# Altium PCB ESP-PCM1822Q1-breakout.PcbDoc
Units mil, origin at the board's own origin, x right, y up, seen from the top; angles counter-clockwise.
Board outline 7750 x 7750 mil, 4 copper layers (Top Layer, Layer 1, Layer 2, Bottom Layer), stack 23.756 mil thick; 84 components, 75 nets, 356 pads, 161 vias.
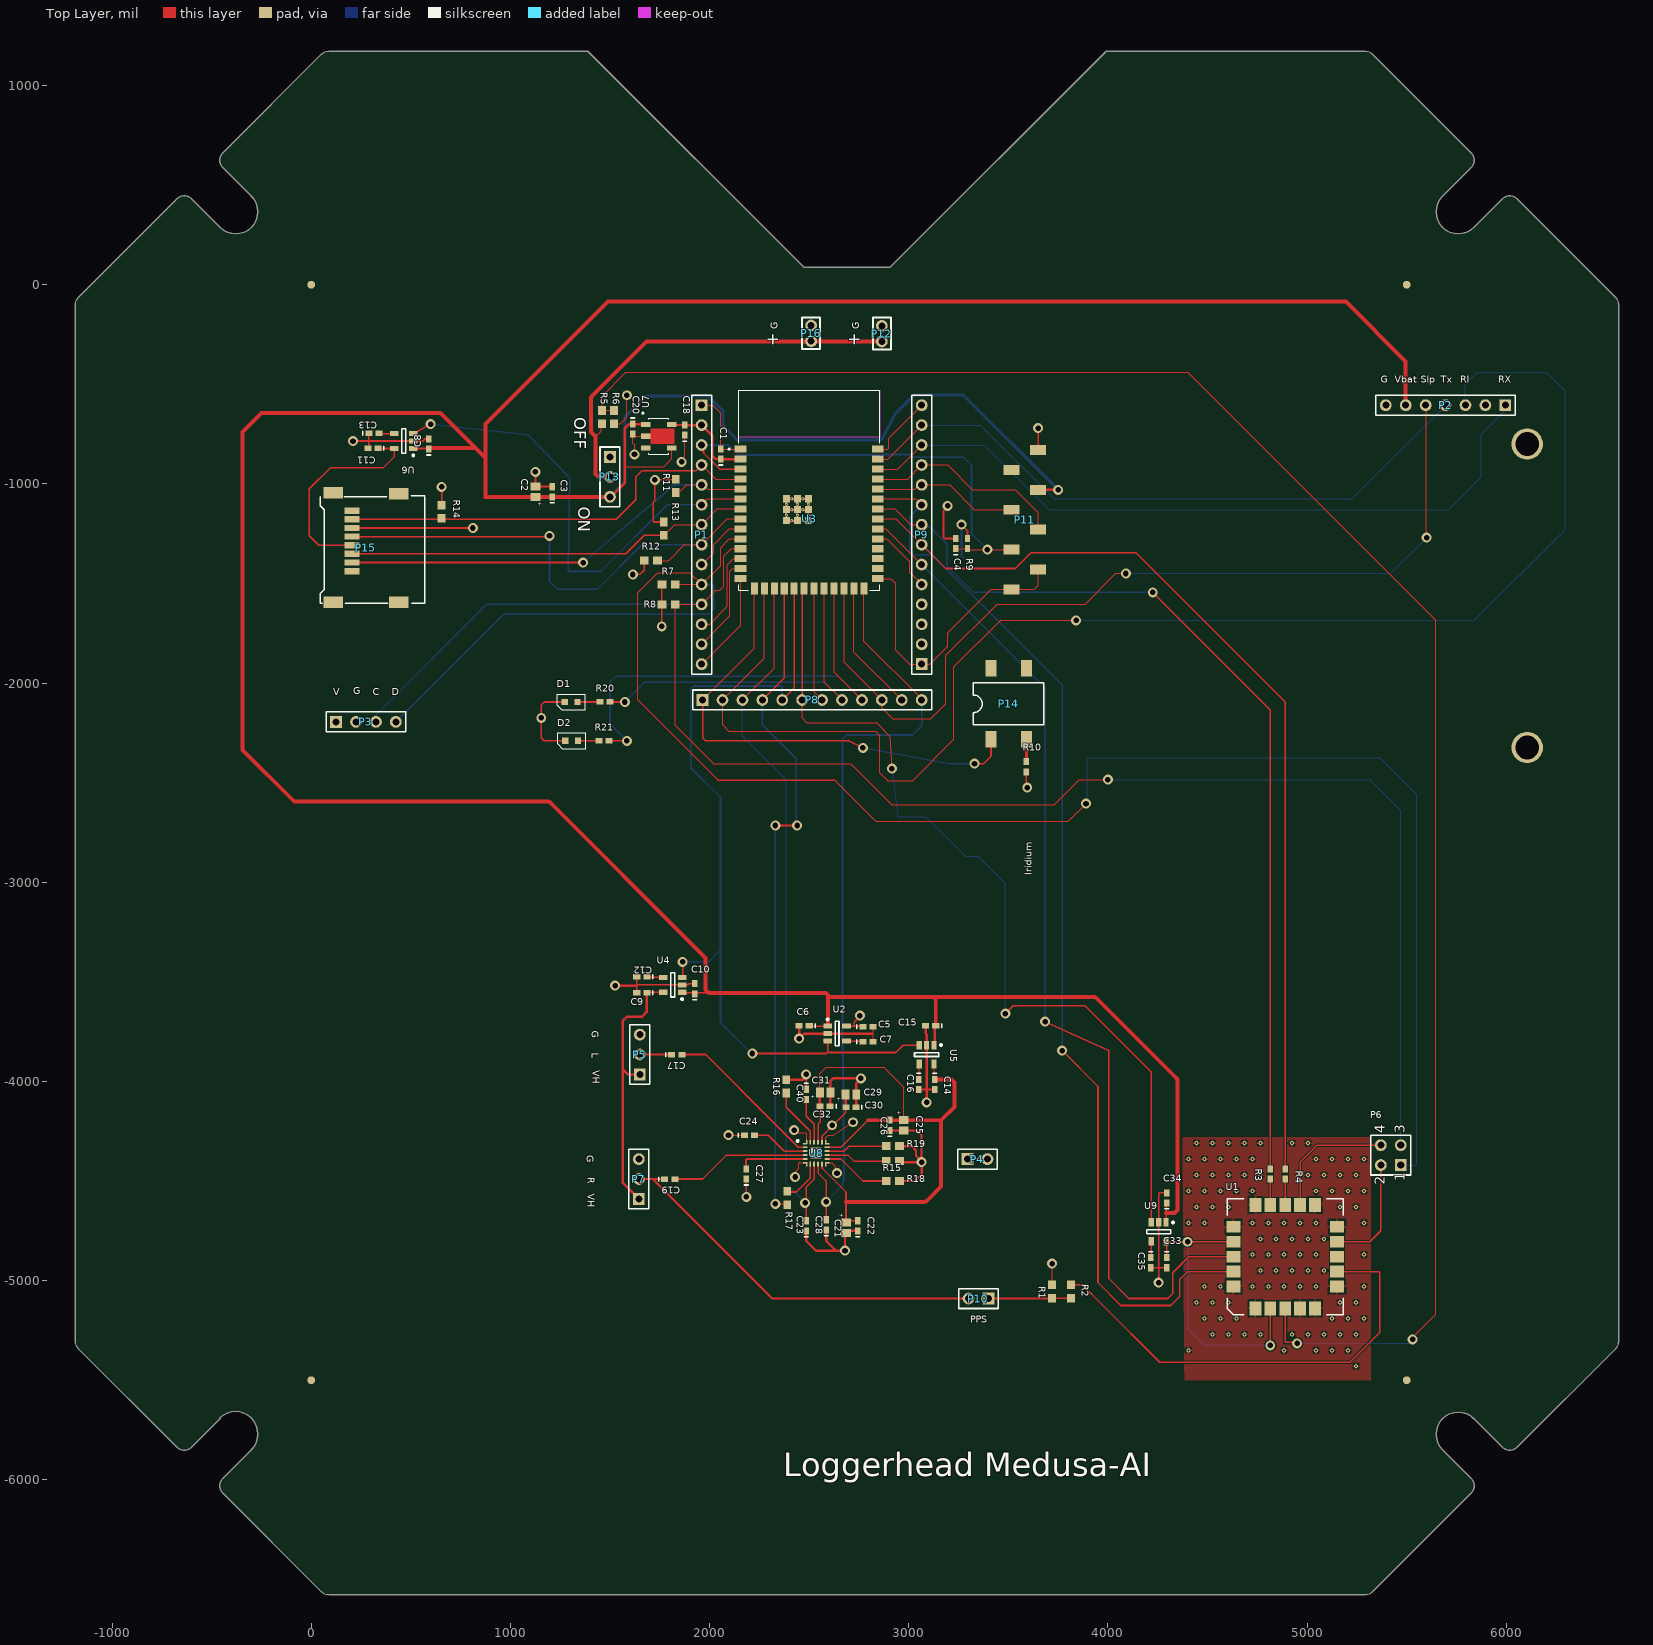
[diagram p0: Top Layer view]
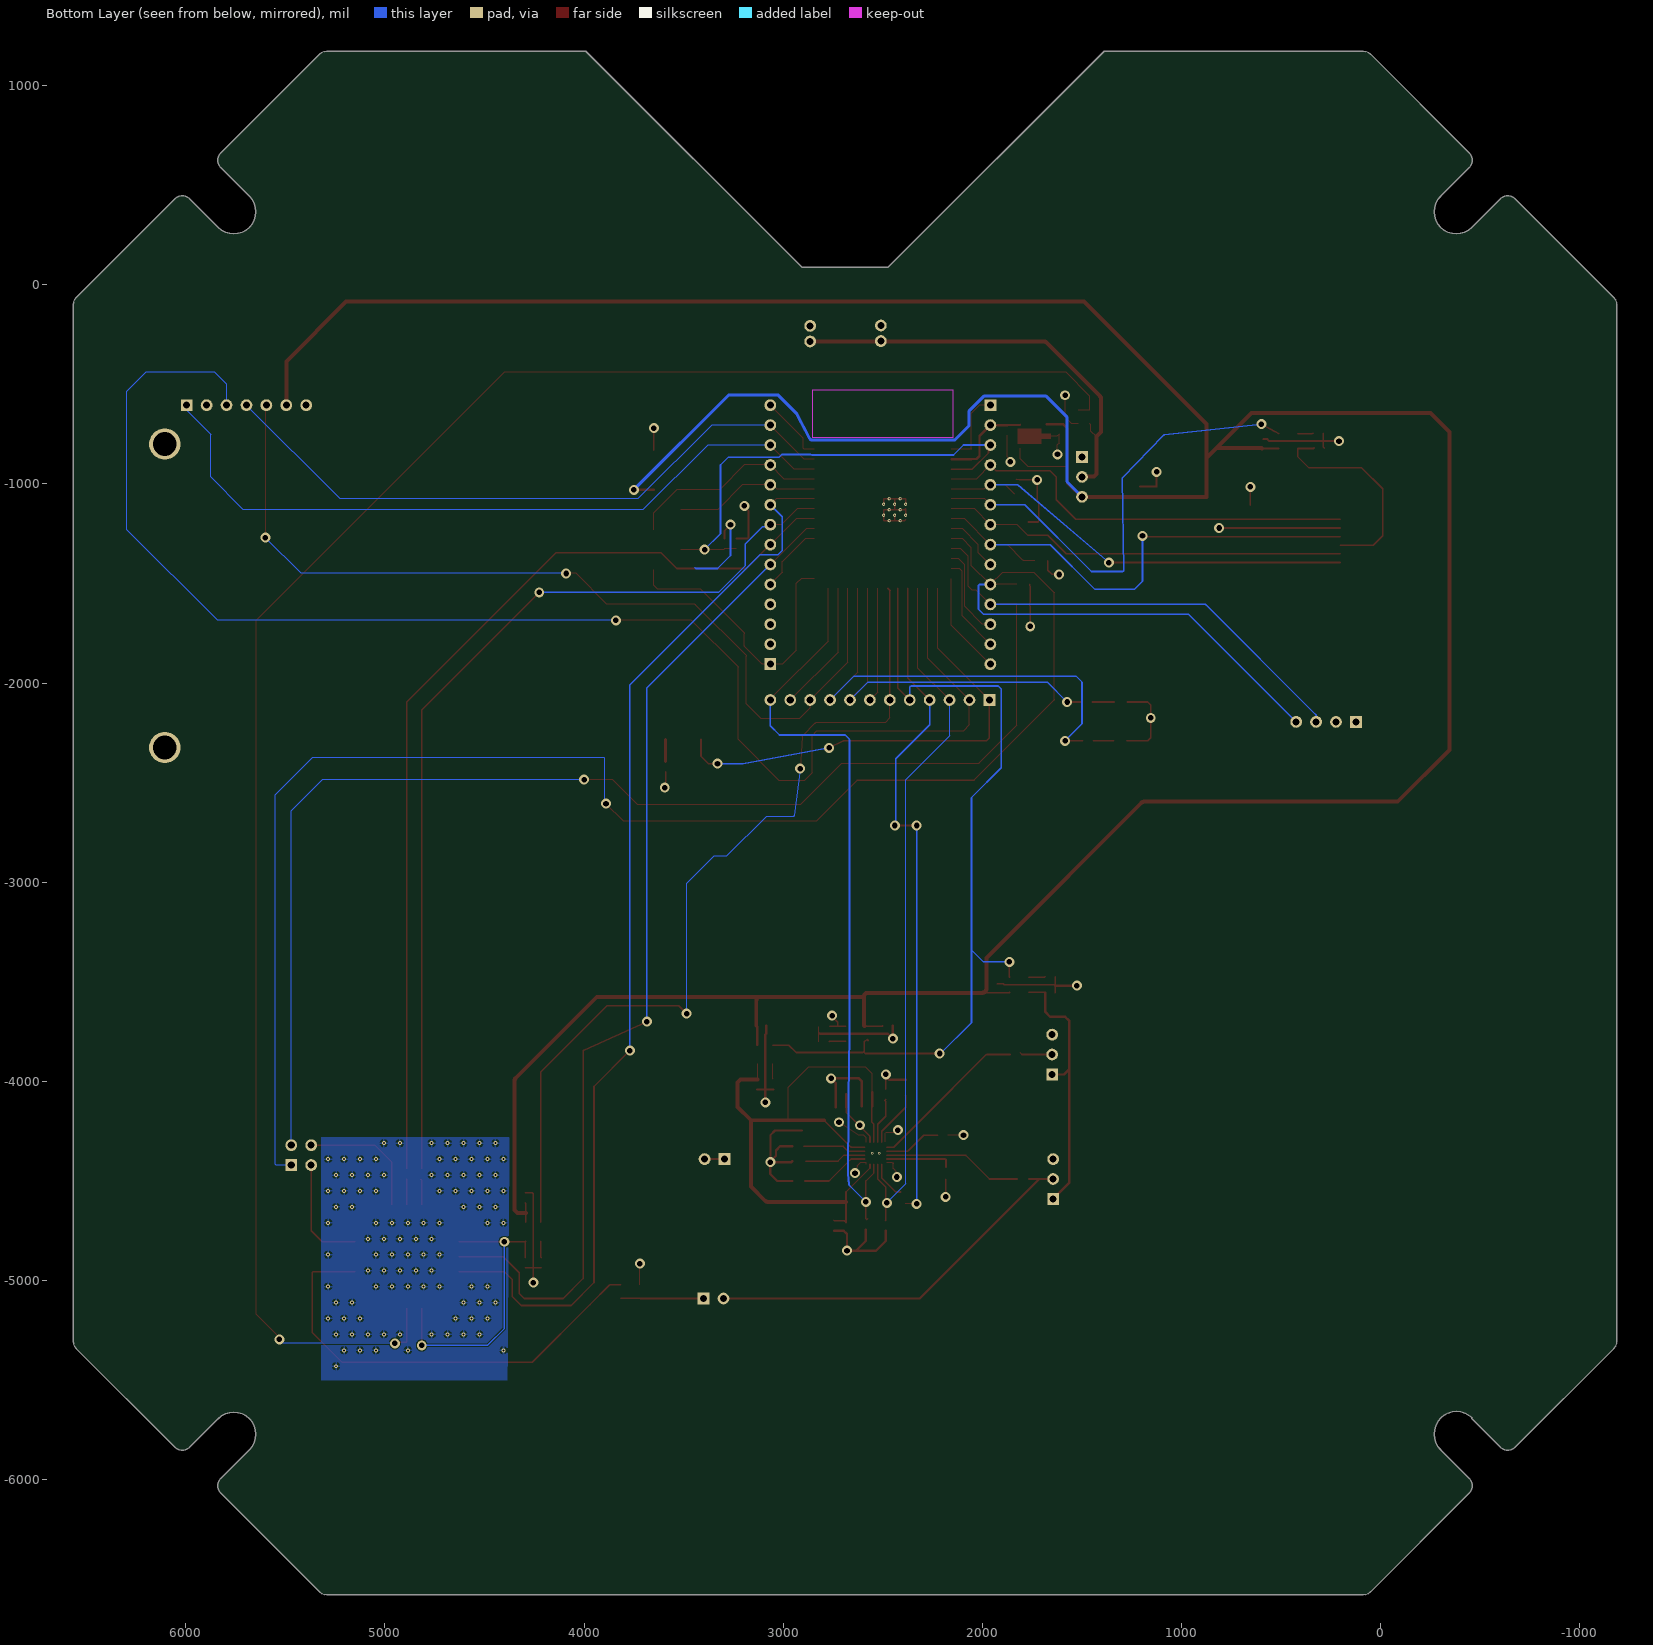
[diagram p1: Bottom Layer view, seen from below]
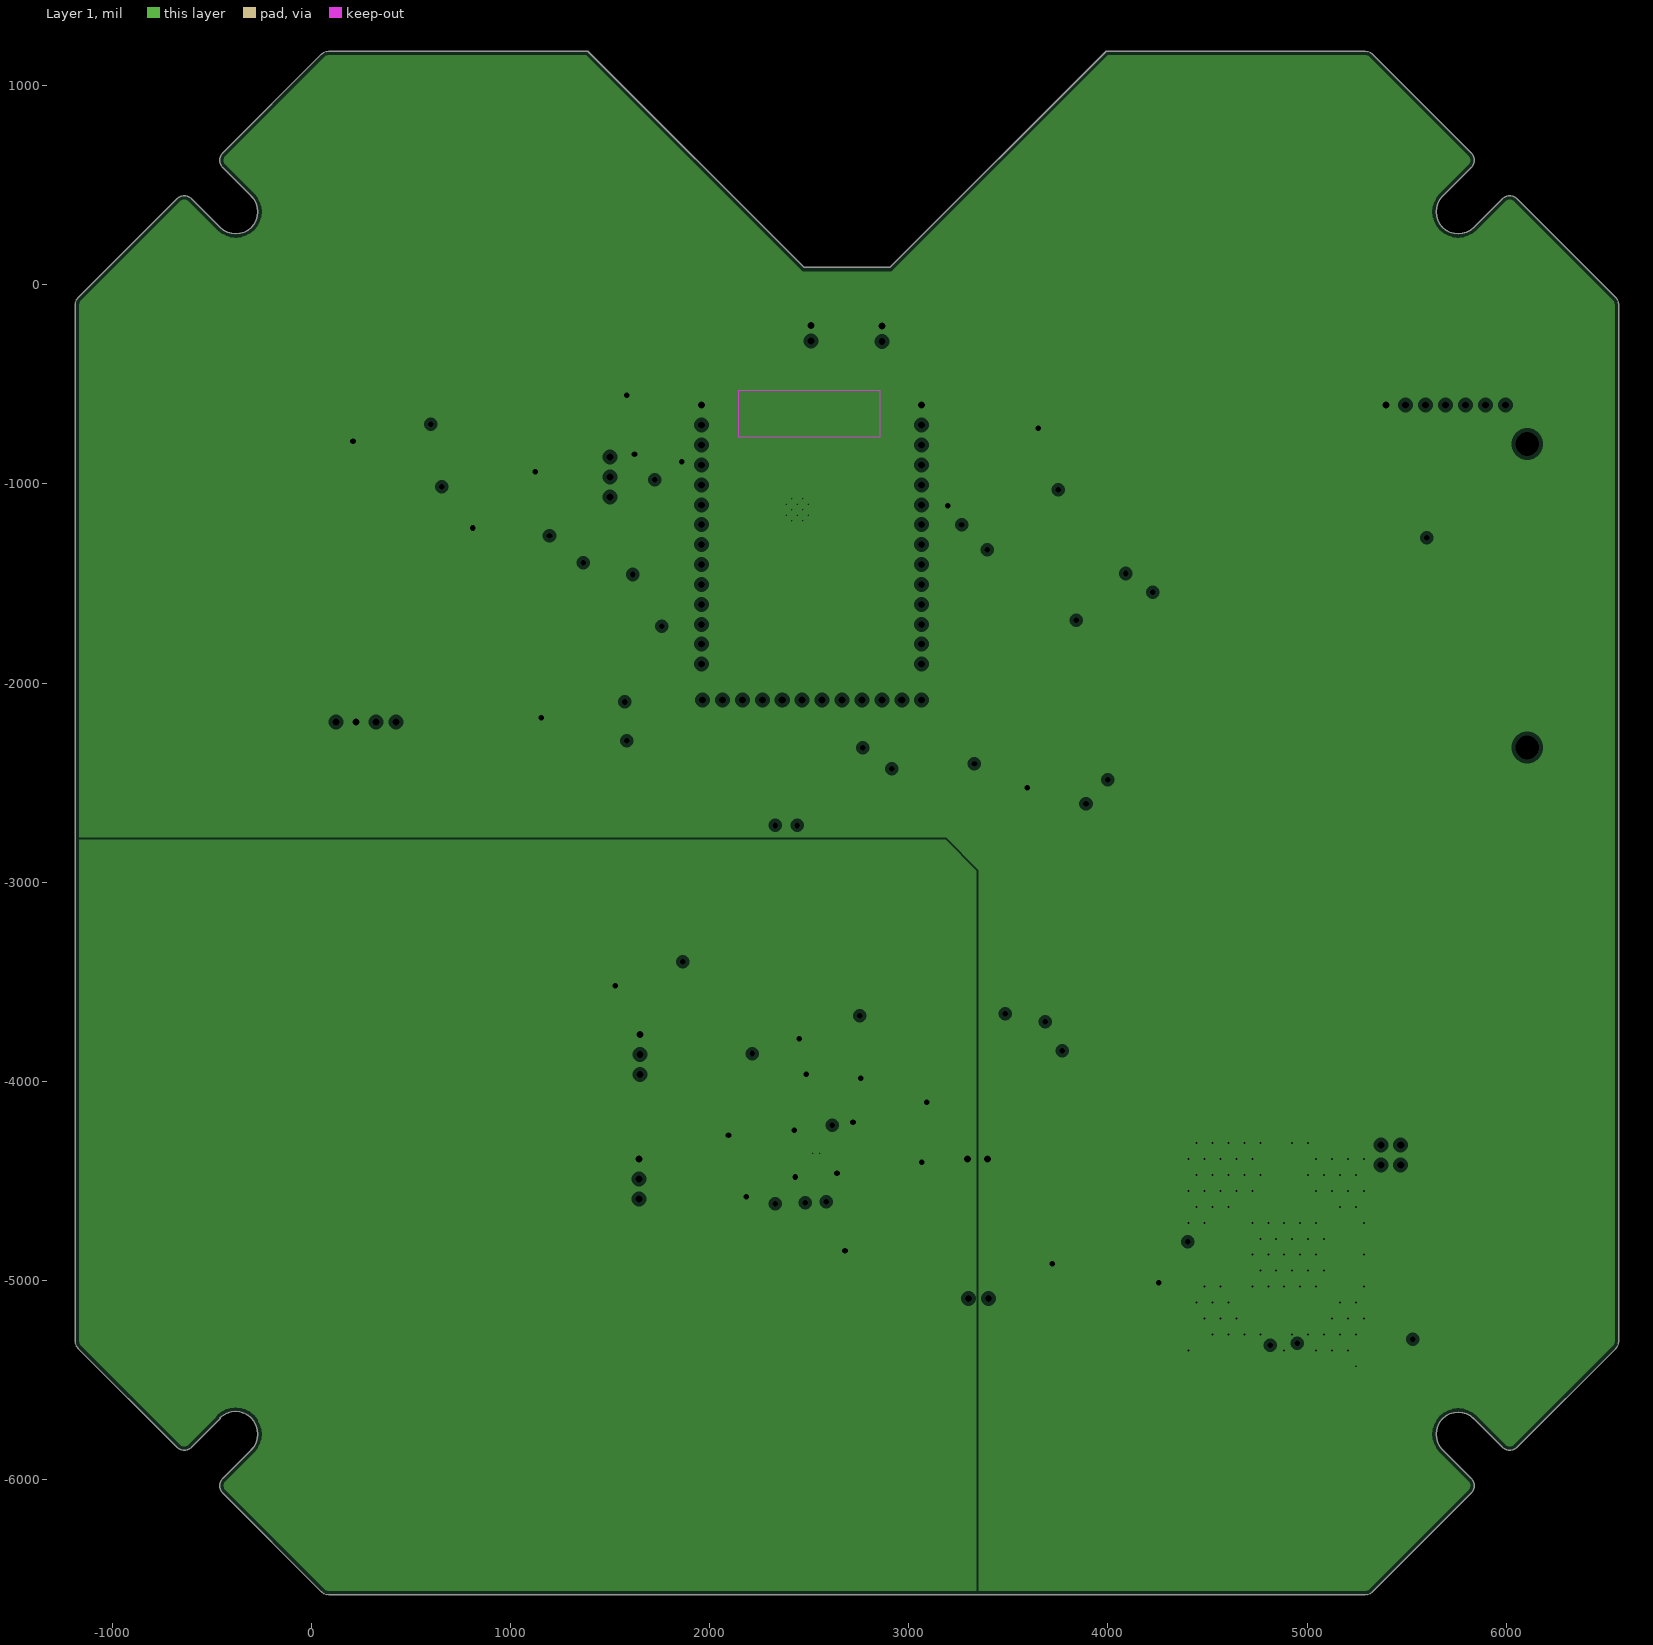
[diagram p2: Layer 1, clearances drawn from the general rule]
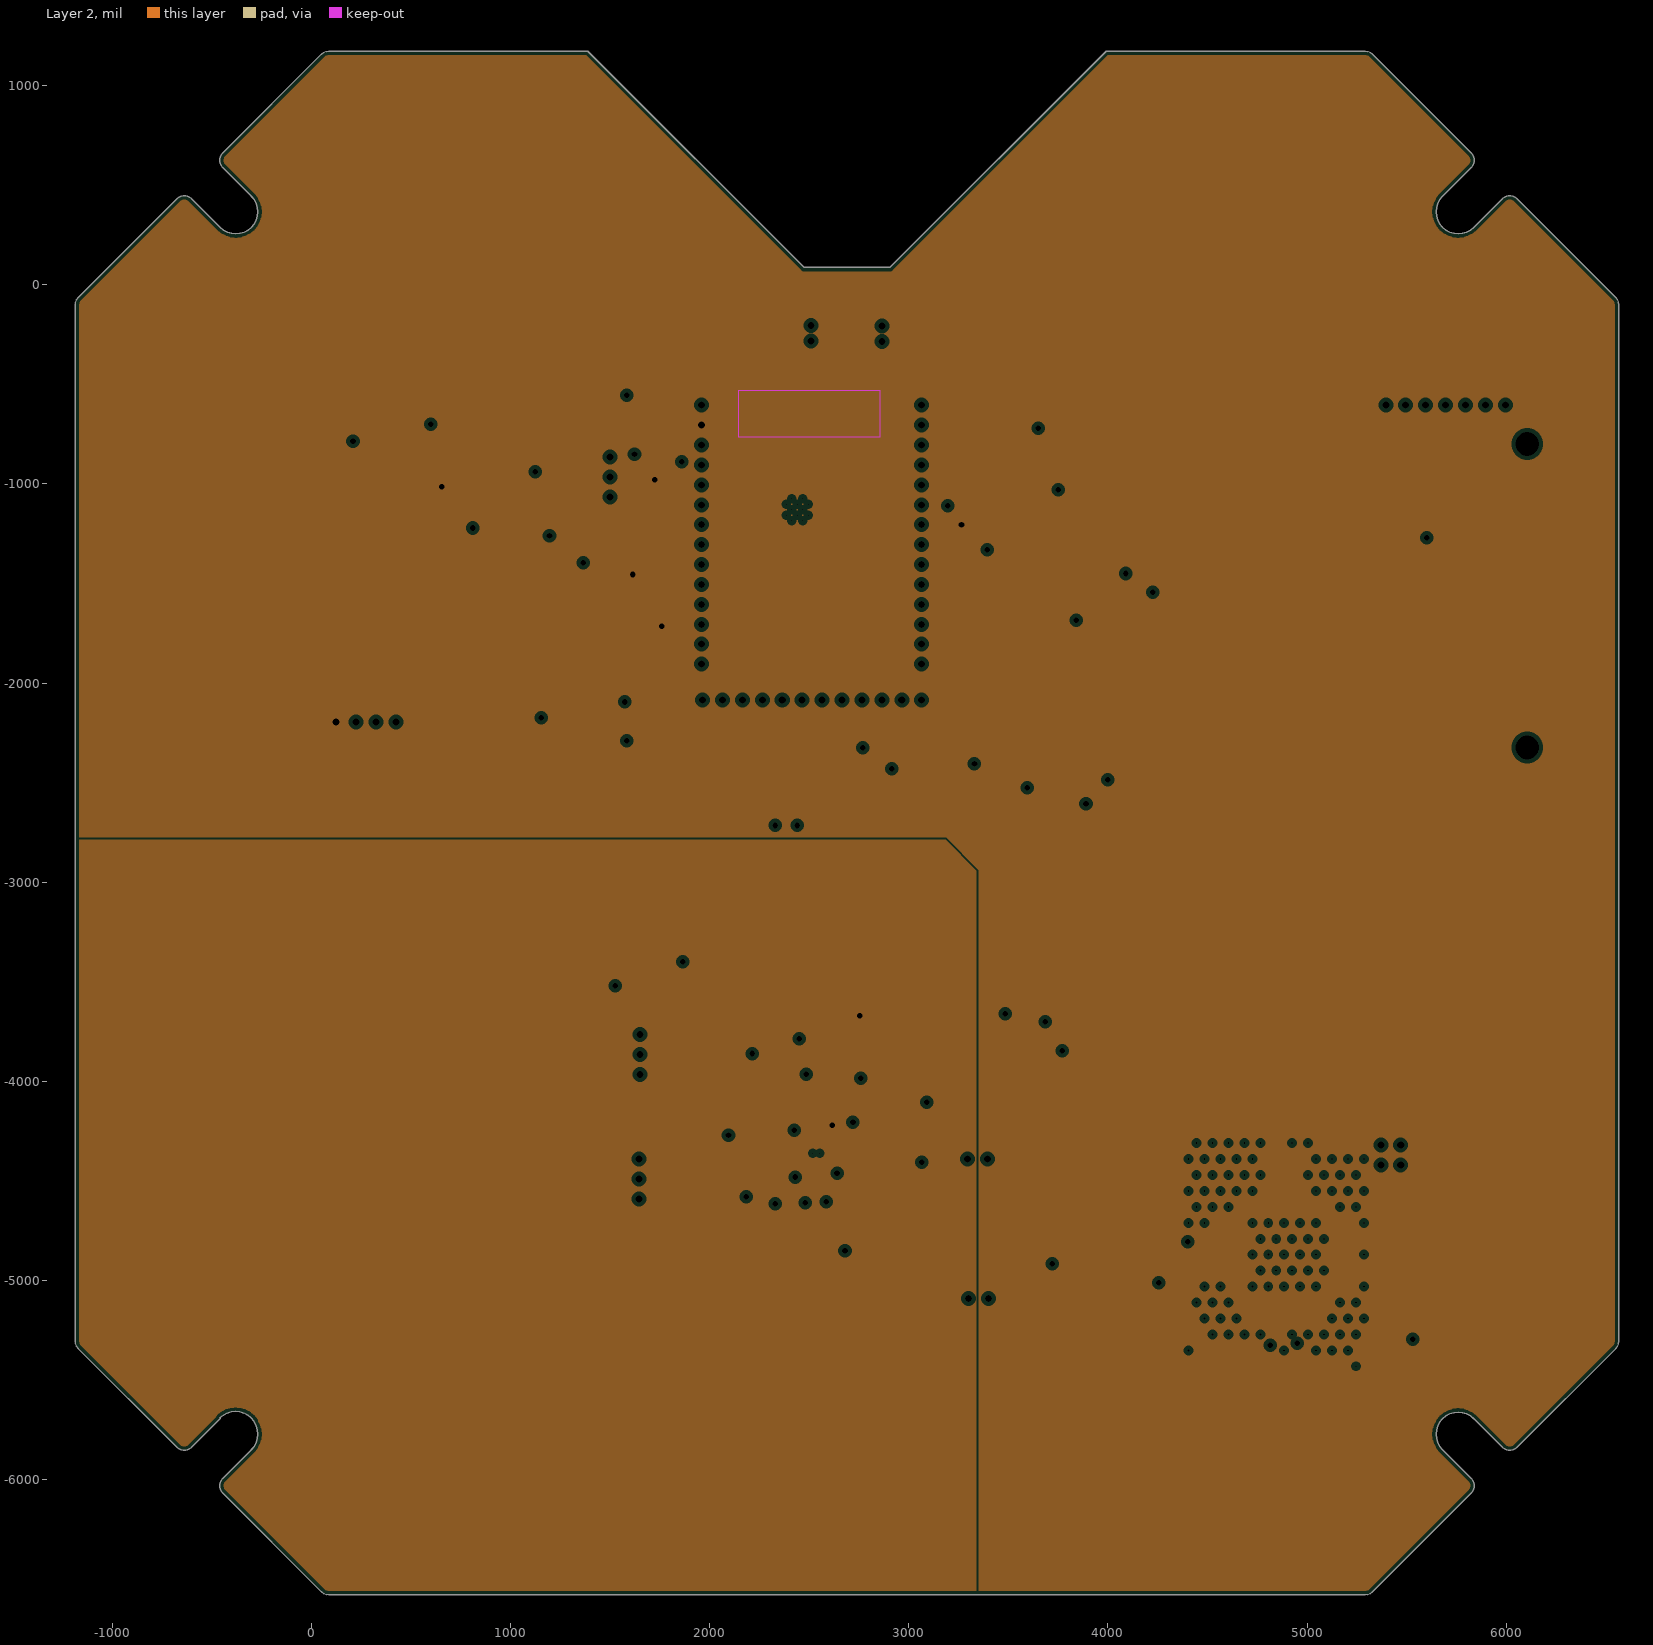
[diagram p3: Layer 2, clearances drawn from the general rule]

## Layer stack, top to bottom
Top Solder: solder mask 0.4, Solder Resist, Dk 3.5
Top Layer: signal copper 1.4
Dielectric 2: prepreg 2.8, PP-006, Dk 4.1
Layer 1: plane copper 1.378, net (Multiple Nets)
Dielectric 1: dielectric 12.6, FR-4, Dk 4.8
Layer 2: plane copper 1.378, net (Multiple Nets)
Dielectric 3: prepreg 2.8, PP-006, Dk 4.1
Bottom Layer: signal copper 1.4
Bottom Solder: solder mask 0.4, Solder Resist, Dk 3.5

## Board outline
-459.78,-6024.11 -457.29,-6013.2 -452.43,-6003.11 -445.45,-5994.36 -300.3,-5849.2 -286.55,-5832.46 -276.34,-5813.36 -270.05,-5792.63 -267.93,-5771.07 -270.05,-5749.51 -276.34,-5728.78 -286.55,-5709.68 -287.85,-5705.7 -301.59,-5688.95 -318.34,-5675.21 -337.44,-5665 -358.17,-5658.71 -379.73,-5656.59 -401.29,-5658.71 -422.01,-5665 -441.12,-5675.21 -457.86,-5688.95 -456.57,-5692.93 -601.72,-5838.08 -610.47,-5845.07 -620.56,-5849.92 -631.47,-5852.41 -642.67,-5852.41 -653.59,-5849.92 -663.67,-5845.07 -672.43,-5838.08 -1170.36,-5340.16 -1178.3,-5329.8 -1183.3,-5317.74 -1185,-5304.8 -1185,-100.47 -1183.3,-87.53 -1178.3,-75.47 -1170.36,-65.12 -672.43,432.81 -663.67,439.79 -653.59,444.65 -642.67,447.14 -631.47,447.14 -620.56,444.65 -610.47,439.79 -601.72,432.81 -456.57,287.66 -439.82,273.92 -420.72,263.7 -399.99,257.42 -378.43,255.29 -356.87,257.42 -336.14,263.7 -317.04,273.92 -300.3,287.66 -286.55,304.4 -276.34,323.51 -270.05,344.24 -267.93,365.79 -270.05,387.35 -276.34,408.08 -286.55,427.18 -300.3,443.93 -445.45,589.08 -452.43,597.83 -457.29,607.92 -459.78,618.84 -459.78,630.03 -457.29,640.95 -452.43,651.04 -445.45,659.79 52.48,1157.72 62.84,1165.66 74.89,1170.66 87.84,1172.36 1388.92,1172.36 2473.92,87.36 2906.08,87.36 3991.08,1172.36 5292.16,1172.36 5305.1,1170.66 5317.16,1165.66 5327.52,1157.72 5825.45,659.79 5832.43,651.04 5837.29,640.95 5839.78,630.03 5839.78,618.84 5837.29,607.92 5832.43,597.83 5825.45,589.08 5680.3,443.93 5666.55,427.18 5656.34,408.08 5650.05,387.35 5647.93,365.79 5650.05,344.24 5656.34,323.51 5666.55,304.4 5680.3,287.66 5697.04,273.92 5716.14,263.71 5736.87,257.42 5758.43,255.29 5779.99,257.42 5800.72,263.71 5819.82,273.92 5836.57,287.66 5981.72,432.81 5990.47,439.79 6000.56,444.65 6011.47,447.14 6022.67,447.14 6033.59,444.65 6043.67,439.79 6052.43,432.81 6550.36,-65.12 6558.3,-75.47 6563.3,-87.53 6565,-100.47 6565,-5304.8 6563.3,-5317.74 6558.3,-5329.8 6550.36,-5340.16 6052.43,-5838.08 6043.67,-5845.07 6033.59,-5849.92 6022.67,-5852.41 6011.47,-5852.41 6000.56,-5849.92 5990.47,-5845.07 5981.72,-5838.08 5836.57,-5692.93 5819.82,-5679.19 5800.72,-5668.98 5779.99,-5662.69 5758.43,-5660.57 5736.87,-5662.69 5716.14,-5668.98 5697.04,-5679.19 5680.3,-5692.93 5666.55,-5709.68 5656.34,-5728.78 5650.06,-5749.51 5647.93,-5771.07 5650.06,-5792.63 5656.34,-5813.36 5666.55,-5832.46 5680.3,-5849.2 5825.45,-5994.35 5832.43,-6003.11 5837.29,-6013.2 5839.78,-6024.11 5839.78,-6035.31 5837.29,-6046.22 5832.43,-6056.31 5825.45,-6065.07 5327.52,-6562.99 5317.16,-6570.94 5305.11,-6575.93 5292.16,-6577.64 87.84,-6577.64 74.9,-6575.93 62.84,-6570.94 52.48,-6562.99 -445.45,-6065.07 -452.43,-6056.31 -457.29,-6046.22 -459.78,-6035.31

## Design rules (kind name [scope] priority, off if disabled: settings)
Clearance [All] p1: gap=6 ignorepadtopadclearanceinfootprint=FALSE
PlaneClearance [All] p1: clearance=20
PlaneConnect [All] p1: planeconnectstyle=Relief reliefexpansion=20 reliefentries=4 reliefconductorwidth=10 reliefairgap=10
PolygonConnect [All] p1: connectstyle=Relief reliefconductorwidth=10 reliefentries=4 polygonreliefangle="90 Angle" airgapwidth=10
RoutingVias [All] p1: holewidth=28 width=50 viastyle="Through Hole" minholewidth=28 minwidth=50 maxholewidth=28 maxwidth=50
SolderMaskExpansion [All] p1: expansion=4 istentingtop=FALSE
Width [All] p1: maxlimit=100 minlimit=6 preferedwidth=8
28 further rules are at their usual default settings.

## Classes and differential pairs
component class medusa-ai-audio: C5 C6 C7 C9 C10 C12 C14 C15 C16 C17 C19 C21 C22 C23 C24 C25 C26 C27 C28 C29 C30 C31 C32 C40 P4 P5 P7 P10 R15 R16 R17 R18 R19 U2 U4 U5 U8
component class ESP-PCM1822Q1-breakout: C1 C2 C3 C4 C8 C11 C13 C18 C20 C33 C34 C35 D1 D2 P1 P2 P3 P6 P8 P9 P11 P12 P13 P14 P15 P16 R1 R2 R3 R4 R5 R6 R7 R8 R9 R10 R11 R12 R13 R14 R20 R21 U1 U3 U6 U7 U9

## Components (designator, comment, footprint, x,y, rotation, side; value= is the part's Value field where it differs from the comment)
C1 "0.1uF" 0402 2055,-850 r90 top
C2 "10uF" Tant0805 1125,-1040 r270 top
C3 "0.1uF" 0402 1210,-1040 r90 top
C4 "1uF" 0402 3235,-1300 r90 top value=0.1uF
C5 "2.2uF" 0402 2795,-3725 r0 top value=0.1uF
C6 "1uF" 0402 2475,-3720 r180 top value=0.1uF
C7 "10nF" 0402 2795,-3800 r0 top value=0.1uF
C8 "1.0uF" 0402 590,-800 r90 top value=0.1uF
C9 "2.2uF" 0402 1660,-3555 r180 top value=0.1uF
C10 "1uF" 0402 1925,-3535 r90 top value=0.1uF
C11 "2.2uF" 0402 310,-820 r180 top value=0.1uF
C12 "10nF" 0402 1660,-3475 r180 top value=0.1uF
C13 "10nF" 0402 315,-745 r0 top value=0.1uF
C14 "2.2uF" 0402 3130,-4015 r270 top value=0.1uF
C15 "1uF" 0402 3110,-3720 r180 top value=0.1uF
C16 "10nF" 0402 3050,-4015 r270 top value=0.1uF
C17 "1.0uF" 0402 1835,-3865 r0 top value=0.1uF
C18 "4.7uF" 0402 1875,-730 r90 top value=0.1uF
C19 "1.0uF" 0402 1800,-4490 r0 top value=0.1uF
C20 "4.7uF" 0402 1615,-724.41 r270 top value=0.1uF
C21 "10uF" Tant0805 2685,-4735 r90 top
C22 "0.1uF" 0402 2745,-4725 r90 top
C23 "22pF" 0402 2485,-4725 r90 top value=0.1uF
C24 "1.0uF" 0402 2200,-4270 r0 top value=0.1uF
C25 "10uF" Tant0805 2975,-4220 r90 top
C26 "0.1uF" 0402 2905,-4220 r90 top
C27 "1.0uF" 0402 2185,-4465 r90 top value=0.1uF
C28 "22pF" 0402 2585,-4720 r90 top value=0.1uF
C29 "1uF" Tant0805 2710,-4065 r180 top value=10uF
C30 "0.1uF" 0402 2710,-4130 r180 top
C31 "10uF" Tant0805 2580,-4055 r180 top
C32 "0.1uF" 0402 2580,-4125 r180 top
C33 "2.2uF" 0402 4295,-4910 r270 top value=0.1uF
C34 "1uF" 0402 4295,-4585 r90 top value=0.1uF
C35 "10nF" 0402 4215,-4910 r270 top value=0.1uF
C40 "1.0uF" 0402 2485,-4065 r270 top value=0.1uF
D1 "LED_0603" Diode0603 1305,-2095 r180 top
D2 "LED_0603" Diode0603 1307.48,-2290 r180 top
P1 "Header 14" HDR1X14 1960,-605 r270 top
P2 "Iridium" HDR1X7 5995,-605 r180 top
P3 "Display" HDR1X4 125,-2195 r0 top
P4 "GND Tie" HDR1X2 3295,-4390 r0 top
P5 "HYDROPHONE L" HDR1X3 1650,-3965 r90 top
P6 "Header 2X2" HDR2X2 5470,-4420 r90 top
P7 "HYDROPHONE R" HDR1X3 1645,-4590 r90 top
P8 "Header 12" HDR1X12 1965,-2085 r0 top
P9 "Header 14" HDR1X14 3065,-1905 r90 top
P10 "Jumper PPS to Audio R" HDR1X2 3400,-5090 r180 top
P11 "10129380-908001BLF" Header_8_SMT 3650,-830 r270 top
P12 "BAT" HDR_2x1_2mm 2865,-285.63 r0 top
P13 "switch" HDR1X3 1500,-865 r270 top
P14 "factory reset" SOP4 3412.83,-2283.27 r90 top
P15 "microSD-Molex" microSD_Molex_hinged 110,-1065 r0 top
P16 "BAT" HDR_2x1_2mm 2510,-283.74 r0 top
R1 "10k" 3-0603 3720,-5055 r270 top
R2 "10k" 3-0603 3815,-5055 r90 top
R3 "100Ohm" 2-0402 4815,-4465 r270 top
R4 "100Ohm" 2-0402 4890,-4465 r270 top
R5 "100k" 3-0603 1460,-665 r270 top
R6 "100k" 3-0603 1520,-665 r90 top
R7 "4.7k" 3-0603 1795,-1505 r180 top
R8 "4.7k" 3-0603 1795,-1605 r180 top
R9 "10k" 2-0402 3295,-1300 r270 top
R10 "10k" 2-0402 3590,-2420 r270 top
R11 "10K" 3-0603 1830,-1010 r270 top
R12 "10K" 3-0603 1705,-1385 r0 top
R13 "10K" 3-0603 1770,-1225 r270 top
R14 "10K" 3-0603 655,-1140 r270 top
R15 "10k" 3-0603 2920,-4400 r0 top
R16 "10k" 3-0603 2385,-4025 r90 top
R17 "51" 3-0603 2390,-4585 r270 top
R18 "10k" 3-0603 2920,-4500 r0 top
R19 "10k" 3-0603 2920,-4325 r0 top
R20 "330 Ohm" 2-0402 1475,-2095 r0 top
R21 "330 Ohm" 2-0402 1470,-2290 r0 top
U1 "SAM-M8Q" "GPS SAM-MQ8" 4740.39,-5139.68 r90 top
U2 "ADP1712" MF05A_N 2640,-3760 r0 top
U3 "ESP32-S3-WROOM-1-N16R8" XCVR_ESP32-S3-WROOM-1-N16R2 2500,-1032.87 r0 top
U4 "ADP1712" MF05A_N 1815,-3515 r180 top
U5 "ADP1712" MF05A_N 3090,-3865 r270 top
U6 "ADP1712" MF05A_N 465,-785 r180 top
U7 "3.3V LDO" AP7361C-33Y5-13 1680,-701.89 r0 top
U8 "PCM1822-Q1" PCM1822-Q1 2535,-4360 r0 top
U9 "ADP1712" MF05A_N 4255,-4755 r270 top

## Footprints (in the part's own frame and the unit in brackets; to place one, negate y for a bottom-side part, rotate by r counter-clockwise, add the part's x,y. Pads: shape width x height; smd on the part's side, far side on the other; paste and mask are expansions set on the pad)
2-0402 [mm] "Chip Resistor; Body 1 x 0.5 mm (LxW typ)"
  rect 0.9x0.7 smd: 1(-0.65,0) 2(0.65,0)
3-0603 [mm] "Chip Resistor; Body 1.6 x 0.9 mm (LxW typ)"
  rect 1.1x1 smd: 1(-0.85,0) 2(0.85,0)
0402 [mm] "Chip Capacitor; Body 1.0 x 0.5 mm (LxW typ)"
  rect 0.9x0.7 smd: 1(-0.65,0) 2(0.65,0)
  silkscreen extent -1.4,-0.25 -1.4,0.25
AP7361C-33Y5-13 [mm] "3.3V LDO"
  rect 1.2x0.68 smd: 1(0,0) 3(0,-3) 4(3.3,-3) 5(3.3,0)
  rect 1.2x0.68 smd paste-2 mask+0: 2(0,-1.5)
  Top Layer region: 3.65,-2.465 0.6,-2.465 0.6,-1.84 -0.6,-1.84 -0.6,-1.16 0.6,-1.16 0.6,-0.535 3.65,-0.535
  silkscreen extent -0.48,-3.8 2.95,1.54
Diode0603 [mm]
  rect 0.8x0.8 smd: A(-0.825,0) K(0.825,0)
  silkscreen extent -1.83,-1 1.8,1
"GPS SAM-MQ8" [mm]
  rect 1.8x1.5 smd paste-0.25: 1(0,0) 2(0,-1.9) 3(0,-3.8) 4(0,-5.7) 5(0,-7.6) 11(13.2,-7.6) 12(13.2,-5.7) 13(13.2,-3.8) 14(13.2,-1.9) 15(13.2,0)
  rect 1.5x1.8 smd paste-0.25: 6(2.8,-10.4) 7(4.7,-10.4) 8(6.6,-10.4) 9(8.5,-10.4) 10(10.4,-10.4) 16(10.4,2.8) 17(8.5,2.8) 18(6.6,2.8) 19(4.7,2.8) 20(2.8,2.8)
  silkscreen extent -0.8,-11.2 14,3.6
HDR1X2 [mm] "Connector; Header; 2 Position"
  rect 1.5x1.5 hole 0.9: 1(0,0)
  round 1.5 hole 0.9: 2(2.54,0)
  silkscreen extent -1.27,-1.27 3.81,1.27
HDR1X3 [mm] "Connector; Header; 3 Position"
  rect 1.5x1.5 hole 0.9: 1(0,0)
  round 1.5 hole 0.9: 2(2.54,0) 3(5.08,0)
  silkscreen extent -1.27,-1.27 6.35,1.27
HDR1X4 [mm] "Connector; Header; 4 Position"
  rect 1.5x1.5 hole 0.9: 1(0,0)
  round 1.5 hole 0.9: 2(2.54,0) 3(5.08,0) 4(7.62,0)
  silkscreen extent -1.27,-1.27 8.89,1.27
HDR1X7 [mm] "Connector; Header; 7 Position"
  rect 1.5x1.5 hole 0.9: 1(0,0)
  round 1.5 hole 0.9: 2(2.54,0) 3(5.08,0) 4(7.62,0) 5(10.16,0) 6(12.7,0) 7(15.24,0)
  silkscreen extent -1.27,-1.27 16.51,1.27
HDR1X12 [mm] "Connector; Header; 12 Position"
  rect 1.5x1.5 hole 0.9: 1(0,0)
  round 1.5 hole 0.9: 2(2.54,0) 3(5.08,0) 4(7.62,0) 5(10.16,0) 6(12.7,0) 7(15.24,0) 8(17.78,0) 9(20.32,0) 10(22.86,0) 11(25.4,0) 12(27.94,0)
  silkscreen extent -1.27,-1.27 29.21,1.27
HDR1X14 [mm] "Connector; Header; 14 Position"
  rect 1.5x1.5 hole 0.9: 1(0,0)
  round 1.5 hole 0.9: 2(2.54,0) 3(5.08,0) 4(7.62,0) 5(10.16,0) 6(12.7,0) 7(15.24,0) 8(17.78,0) 9(20.32,0) 10(22.86,0) 11(25.4,0) 12(27.94,0) 13(30.48,0) 14(33.02,0)
  silkscreen extent -1.27,-1.27 34.29,1.27
HDR2X2 [mm] "Connector; Header; 2x2 Position"
  rect 1.5x1.5 hole 0.9: 1(0,0)
  round 1.5 hole 0.9: 2(0,2.54) 3(2.54,0) 4(2.54,2.54)
  silkscreen extent -1.27,-1.27 3.81,3.81
HDR_2x1_2mm [mm]
  round 1.5 hole 0.9: 1(0,0.016) 2(0,2)
  silkscreen extent -1.14,-1.02 1.14,3.05
Header_8_SMT [mil] "Amphenol  10129380-908001BLF"
  rect 50x80 smd: 1(0,0) 2(100,-135) 3(200,0) 4(300,-135) 5(400,0) 6(500,-135) 7(600,0) 8(700,-135)
MF05A_N [mm] "SOT23, 5-Leads, Body 2.9x1.6mm, Pitch 0.95mm, Lead Span 2.8mm, IPC Medium Density"
  rect 1.1x0.65 smd: 1(-1.2,0.95) 2(-1.2,0) 3(-1.2,-0.95) 4(1.2,-0.95) 5(1.2,0.95)
  silkscreen extent -1.32,-1.55 0.25,1.95, body extent -0.9,-1.55 0.9,1.55, height 1.19
microSD_Molex_hinged [mm]
  rect 2.5x1.45 smd: 0(0,-13.45) 0(8.382,-13.462)
  rect 2.5x1.5 smd: 0(0,0.508) 0(8.382,0.381)
  rect 1.9x0.8 smd: 1(2.4,-9.475) 2(2.4,-8.375) 3(2.4,-7.275) 4(2.4,-6.175) 5(2.4,-5.075) 6(2.4,-3.975) 7(2.4,-2.875) 8(2.4,-1.775)
  silkscreen extent -1.65,-13.59 11.68,0.13
PCM1822-Q1 [mm] "QFN, 16-Leads, Body 3.00x3.00mm, Pitch 0.50mm, Thermal Pad 1.40x1.40mm, IPC Medium Density"
  rrect50% 0.6x0.25 smd mask+0.07: 1(-1.4,0.75) 2(-1.4,0.25) 3(-1.4,-0.25) 4(-1.4,-0.75) 11(1.4,-0.75) 12(1.4,-0.25) 13(1.4,0.25) 14(1.4,0.75)
  rrect50% 0.575x0.175 smd mask+0.07: 5(-1.413,-1.213) 10(1.412,-1.213) 15(1.412,1.213) 20(-1.412,1.213)
  rrect50% 0.175x0.575 smd mask+0.07: 5(-1.213,-1.412) 10(1.212,-1.412) 15(1.212,1.412) 20(-1.213,1.426)
  rrect50% 0.25x0.6 smd mask+0.07: 6(-0.75,-1.4) 7(-0.25,-1.4) 8(0.25,-1.4) 9(0.75,-1.4) 16(0.75,1.4) 17(0.25,1.4) 18(-0.25,1.4) 19(-0.75,1.4)
  rect 1.4x1.4 smd paste-0.1 mask+0.07: 21(0,0)
  silkscreen extent -2.47,1.43 -2.22,1.67, body extent -1.55,-1.55 1.55,1.55, height 0.8
SOP4 [mm]
  rect 2.1x1.4 smd: 1(0,0) 2(0,-4.5) 3(9.1,-4.5) 4(9.1,0)
  silkscreen extent 1.89,-6.75 7.21,2.25
Tant0805 [mil]
  rect 40x50 smd: 1(-26.5,0) 2(26.5,0)
XCVR_ESP32-S3-WROOM-1-N16R2 [mm]
  rect 1.5x0.9 smd: 1(-8.75,5.26) 2(-8.75,3.99) 3(-8.75,2.72) 4(-8.75,1.45) 5(-8.75,0.18) 6(-8.75,-1.09) 7(-8.75,-2.36) 8(-8.75,-3.63) 9(-8.75,-4.9) 10(-8.75,-6.17) 11(-8.75,-7.44) 12(-8.75,-8.71) 13(-8.75,-9.98) 14(-8.75,-11.25) 27(8.75,-11.25) 28(8.75,-9.98) 29(8.75,-8.71) 30(8.75,-7.44) 31(8.75,-6.17) 32(8.75,-4.9) 33(8.75,-3.63) 34(8.75,-2.36) 35(8.75,-1.09) 36(8.75,0.18) 37(8.75,1.45) 38(8.75,2.72) 39(8.75,3.99) 40(8.75,5.26)
  rect 0.9x1.5 smd: 15(-6.985,-12.5) 16(-5.715,-12.5) 17(-4.445,-12.5) 18(-3.175,-12.5) 19(-1.905,-12.5) 20(-0.635,-12.5) 21(0.635,-12.5) 22(1.905,-12.5) 23(3.175,-12.5) 24(4.445,-12.5) 25(5.715,-12.5) 26(6.985,-12.5)
  rect 0.9x0.9 smd: 41_1(-1.5,-2.46) 41_2(-2.9,-2.46) 41_3(-0.1,-2.46) 41_4(-2.9,-3.86) 41_5(-1.5,-3.86) 41_6(-0.1,-3.86) 41_7(-2.9,-1.06) 41_8(-1.5,-1.06) 41_9(-0.1,-1.06)
  round 0.4 hole 0.2 mask+0: 41_10(-1.5,-1.76) 41_11(-2.9,-1.76) 41_12(-0.1,-1.76) 41_13(-2.9,-3.16) 41_14(-1.5,-3.16) 41_15(-0.1,-3.16) 41_16(-2.2,-1.06) 41_17(-0.8,-1.06) 41_18(-2.2,-2.46) 41_19(-0.8,-2.46) 41_20(-2.2,-3.86) 41_21(-0.8,-3.86)
  Keep-Out Layer region: 9,6.75 -9,6.75 -9,12.75 9,12.75
  Keep-Out Layer region: 9,6.75 -9,6.75 -9,12.75 9,12.75
  silkscreen extent -10.3,-12.75 9,12.75

## Part data
C1 C3 C4 C5 C6 C7 C8 C9 C10 C11 C12 C13 C14 C15 C16 C17 C18 C19 C20 C22 C23 C24 C26 C27 C28 C30 C32 C33 C34 C35 C40: library part C0402, "Ceramic Chip Capacitor - Standard", PackageDocument=Mar-2001, Code_IPC="1005 [0402]", Code_JEITA=0402, ComponentLink1Description="Manufacturer Link", ComponentLink1URL=http://www.kemet.com/, ComponentLink2Description=Datasheet, ComponentLink2URL=http://www.kemet.com/kemet/web/homepage/kechome.nsf/vapubfilesname/F3102TA.pdf/$file/F3102TA.pdf, DatasheetDocument=Mar-2001, LatestRevisionDate=19-Mar-2004, LatestRevisionNote="Silkscreen size reduced.", Note="Footprint corresponds to dimensions for bulk cassette packaging. This case size has tightened tolerances.", PackageReference=0402, Published=17-Jul-2002, Publisher="Altium Limited"
C2 C21 C25 C29 C31: library part Tant0805
D1 D2: Supplier Part Number 1=18AC7715, Supplier 1=Newark
P1 P9: "Header, 14-Pin", LatestRevisionDate=17-Jul-2002, LatestRevisionNote="Re-released for DXP Platform.", Publisher="Altium Limited"
P2: library part "Header 7", "Header, 7-Pin", LatestRevisionDate=17-Jul-2002, LatestRevisionNote="Re-released for DXP Platform.", Publisher="Altium Limited"
P3: library part "Header 4", "Header, 4-Pin", LatestRevisionDate=17-Jul-2002, LatestRevisionNote="Re-released for DXP Platform.", Publisher="Altium Limited"
P4 P10: library part "Header 2", "Header, 2-Pin", LatestRevisionDate=17-Jul-2002, LatestRevisionNote="Re-released for DXP Platform.", Publisher="Altium Limited"
P5 P7 P13: library part "Header 3", "Header, 3-Pin", LatestRevisionDate=17-Jul-2002, LatestRevisionNote="Re-released for DXP Platform.", Publisher="Altium Limited"
P6: "Header, 2-Pin, Dual row", LatestRevisionDate=17-Jul-2002, LatestRevisionNote="Re-released for DXP Platform.", Publisher="Altium Limited"
P8: "Header, 12-Pin", LatestRevisionDate=17-Jul-2002, LatestRevisionNote="Re-released for DXP Platform.", Publisher="Altium Limited"
P11: library part Header8_SMT, "Surface mount header", Supplier Part Number 1=649-1012938090801BLF, Supplier 1=Mouser
P12 P16: library part HDR_2x1_2mm
P14: library part pushbutton, Supplier Part Number 1=450-1757-2-ND, Supplier 1=Digi-Key
P15: library part microSD_Molex_hinged, Supplier Part Number 1=WM19081DKR-ND, Supplier 1=Digi-Key
R1 R2 R5 R6 R7 R8 R15 R16 R17 R18 R19: library part ERJ3RK, "Precision Thick Film Chip Resistor, 10 Ohm to 1M Ohm Range, 1% and 0.5% Tolerance, 0603 Size, 0.063 W", PackageDocument=Mar-2003, Code_IPC="1608 [0603]", ComponentLink1Description="Manufacturer Link", ComponentLink1URL=http://www.panasonic.com/industrial/components/resistive_products.htm, ComponentLink2Description=Datasheet, ComponentLink2URL=http://www.panasonic.com/industrial/components/pdf/AOA0000CE2.pdf, LatestRevisionDate=19-Mar-2004, LatestRevisionNote="Silkscreen size reduced.", PackageReference=3-0603, Published=17-Dec-2003, Publisher="Altium Limited"
R3 R4 R9 R10 R20 R21: library part ERJ2RB, "Precision Thick Film Chip Resistor, 10 Ohm to 1M Ohm Range, 1% and 0.5% Tolerance, 0402 Size, 0.063 W", PackageDocument=Mar-2003, Code_IPC="1005 [0402]", ComponentLink1Description="Manufacturer Link", ComponentLink1URL=http://www.panasonic.com/industrial/components/resistive_products.htm, ComponentLink2Description=Datasheet, ComponentLink2URL=http://www.panasonic.com/industrial/components/pdf/AOA0000CE2.pdf, LatestRevisionDate=19-Mar-2004, LatestRevisionNote="Silkscreen size reduced.", PackageReference=2-0402, Published=17-Dec-2003, Publisher="Altium Limited"
R11 R12 R13 R14: library part ERJ3EK, "Precision Thick Film Chip Resistor, 10 Ohm to 1M Ohm Range, 1% and 0.5% Tolerance, 0603 Size, 0.063 W", PackageDocument=Mar-2003, Code_IPC="1608 [0603]", ComponentLink1Description="Manufacturer Link", ComponentLink1URL=http://www.panasonic.com/industrial/components/resistive_products.htm, ComponentLink2Description=Datasheet, ComponentLink2URL=http://www.panasonic.com/industrial/components/pdf/AOA0000CE2.pdf, LatestRevisionDate=19-Mar-2004, LatestRevisionNote="Silkscreen size reduced.", PackageReference=3-0603, Published=17-Dec-2003, Publisher="Altium Limited"
U1: library part "GPS SAM-M8Q"
U2 U4 U5 U6 U9: library part LP3985IM5-3.3, "Micropower, 150mA Low-Noise Ultra Low-Dropout CMOS Voltage Regulator", DigiKeyPartNumber=LP3985IM5-3.3CT-ND, Manufacturer="National Semiconductor", PackageTopMarking=LDQB*XTT, PowerWise=N, ComponentLink1Description="LP3985 Datasheet", ComponentLink1URL=http://www.national.com/ds/LP/LP3985.pdf, ComponentLink2Description="LP3985 Web Page", ComponentLink2URL=http://www.national.com/pf/LP/LP3985.html, ComponentLink3Description="MF05A Package Page", ComponentLink3URL=http://www.national.com/packaging/folders/mf05a.html, CompType="LDO IC", DatasheetVersion=Aug-2005, PackageDescription="Molded SOT-23, .115 x .063 x .040 in Body, 5 Lead, .0375 in Pitch", PackageReference=MF05A, PackageVersion="revD, Aug-2008", PartNumber=LP3985IM5-3.3, PinCount=5, Published=4-Dec-2008, Publisher="Altium Limited", RoHS=O
U3: library part ESP32-S3-WROOM-1-N16R2, "Bluetooth, WiFi 802.11b/g/n, Bluetooth v5.0 Transceiver Module 2.4GHz PCB Trace Surface Mount", Package=None, Availability="In Stock", Check_prices=https://www.snapeda.com/parts/ESP32-S3-WROOM-1-N16R2/Espressif+Systems/view-part/?ref=eda, MF="Espressif Systems", MP=ESP32-S3-WROOM-1-N16R2, Price=None, Purchase-URL=https://pricing.snapeda.com/search/part/ESP32-S3-WROOM-1-N16R2/?ref=eda, SnapEDA_Link=https://www.snapeda.com/parts/ESP32-S3-WROOM-1-N16R2/Espressif+Systems/view-part/?ref=snap
U7: library part AP7361C-33Y5-13
U8: "TI PCM1822-Q1 Stereo Channel, 32-Bit, 192-kHz, Burr-Brown Audio ADC"

## Free pads (board coordinates)
  round 157.48 hole 120: 0(6105,-2323.62) 0(6105,-800)
  round 39.37 smd: 10(0,-5500) 10(0,0) 10(5500,-5500) 10(5500,0)

## Via types
v1: diameter 20, hole 10, Top Layer to Bottom Layer, tented both sides, 97 vias
v2: diameter 50, hole 28, Top Layer to Bottom Layer, 61 vias
v3: diameter 11.81, hole 7.87, Top Layer to Bottom Layer, 2 vias
v4: diameter 50, hole 28, Top Layer to Bottom Layer, tented both sides, 1 vias

## Nets (pads, with @x,y where several pads share a name; then routed paths per layer and width w, separated by ;. In a path a pad name is that pad's centre, name@x,y a point inside that pad or via, vN(x,y) a via of type N, cw(c..) or ccw(c..) an arc to the next point about the centre after c; other vN are vias at no path point)
3V3: C1.1 C18.2 P1.2 P3.1 R7.2 R8.2 R9.1 R11.1 R12.1 R13.1 R14.1 U3.2 U7.5 | length 1708.6
  Top Layer w6: U7.5 U7.5@1812.44,-704.41 ; C18.2 C18.2@1875.59,-705 ; C1.1@2054.41,-875 C1.1 C1.1@2055.2,-875.79
  Top Layer w8: R14.1 v2(655,-1015) ; v2(1615,-1455) 1617,-1453 1652,-1453 1671.54,-1433.46 R12.1 ; v2(1760,-1715) 1760,-1620.69 R8.2 1760.95,-1589.31 1760.95,-1520.69 R7.2 ; R13.1 1721.22,-1191.54 1716.54,-1186.85 1716.54,-1093.34 1725,-1084.88 v2(1725,-980) 1814.31,-980 R11.1 ; v2(3265,-1205) 3295,-1235 R9.1
  Top Layer w12: U7.5@1812.44,-704.41 C18.2 ; C18.2@1875.59,-705 P1.2 2015,-760 2015,-860 2030,-875 C1.1@2054.41,-875 ; C1.1@2055.2,-875.79 U3.2
  Bottom Layer w8: v2(3265,-1205) 3265,-1360 3330,-1425 3440.31,-1425 3445,-1420.31
4V2: P12.1 P13.2 P16.1 R5.2 | length 2126
  Top Layer w6: 1426.89,-763.11 1455,-735 1455,-703.46 R5.2
  Top Layer w20: P13.2 1498.58,-963.58 1440.47,-963.58 1426.89,-950 1426.89,-763.11 1426.89,-761.89 1405,-740 1405,-573.22 cw(c1425,-573.28) 1410.8,-559.2 1679.18,-290.82 cw(c1693.28,-305) 1693.22,-285 1693.28,-285 2510,-285 P12.1
AGND: C5.2 C6.2 C7.2 C9.2 C10.2 C12.2 C14.2 C15.2 C16.2 C21.1 C22.1 C23.1 C24.1 C25.1 C26.1 C27.1 C28.1 C29.1 C30.1 C31.1 C32.1 C40.1 P4.1 P5.3 P7.3 R15.2 R16.2 R18.2 R19.2 U2.2 U4.2 U5.2 U8.5 U8.10 U8.15 U8.20 U8.21 | length 4067.4
  Top Layer w6: v2(2095,-4270) C24.1 ; v2(2425,-4245) 2437.24,-4257.24 2483.72,-4257.24 2487.24,-4260.75 U8.20@2487.24,-4303.87 ; v2(2430,-4480) 2427.4,-4460.96 cw(c2433.34,-4460.14) 2429.08,-4455.92 2445.51,-4439.49 ccw(c2441.24,-4435.27) 2447.24,-4435.27 2447.24,-4413.76 cw(c2453.24,-4413.76) 2453.24,-4407.76 U8.5@2479.39,-4407.76 ; C6.2 C6.2@2450,-3720.59 ; U8.10@2582.74,-4415.61 2583.18,-4415.17 2583.18,-4407.76 2590.61,-4407.76 2612.76,-4407.76 2628.1,-4423.1 cw(c2623.86,-4427.34) 2629.6,-4425.61 v2(2640,-4460) ; U8.15@2582.74,-4304.39 2582.74,-4282.26 2595,-4270 2618.22,-4270 ccw(c2618.22,-4264) 2621.49,-4269.03 v2(2720,-4205) ; C31.1@2605.59,-4055.91 C31.1 ; C29.1@2735.59,-4065.91 C29.1 ; 2815,-3760 2820.59,-3754.41 ; C7.2 2820.59,-3754.41 ; C5.2 2820.59,-3754.41 ; C25.1@2974.09,-4245.59 C25.1 ; v2(3065,-4405) v2@3065,-4401.46
  Top Layer w8: C9.2 1635,-3554.41 1635,-3519.69 ; C12.2 1634.41,-3519.1 1635,-3519.69 ; C10.2 1924.1,-3510.31 1895,-3510.31 1890.31,-3515 U4.2 1639.69,-3515 1635,-3519.69 ; v2(2185,-4580) C27.1 ; C40.1 v2@2485,-3975
  Top Layer w10: C26.1 C25.1@2974.09,-4245.59 ; C25.1 3041.5,-4246.5 3065,-4270 v2@3065,-4401.46
  Top Layer w12: v2(1525.9,-3519.1) 1634.41,-3519.1 ; R16.2 2468.46,-3991.54 v2@2485,-3975 ; C6.2@2450,-3720.59 v2(2450,-3785) 2475,-3760 U2.2 2815,-3760 ; C23.1 2485,-4800 2535,-4850 2635,-4850 ; C28.1 2585,-4800 2635,-4850 ; C32.1 C31.1@2605.59,-4055.91 ; C31.1 2606.5,-3998.5 2620,-3985 2622.36,-3985 v2(2760,-3985) 2736.5,-4008.5 C29.1 ; C30.1 C29.1@2735.59,-4065.91 ; C22.1 2695.91,-4750.59 C21.1 2680,-4766.5 v2(2680,-4850) 2635,-4850 ; R18.2 3030,-4500 3065,-4465 v2(3065,-4405) 2958.46,-4405 R15.2 ; R19.2 3015,-4325 3036.36,-4346.36 3036.36,-4372.82 v2@3065,-4401.46 ; C16.2 3090,-4040.59 ; C15.2 3084.41,-3759.41 3090,-3765 U5.2 3090,-4040.59 ; v2(3090,-4105) 3090,-4040.59 ; C14.2 3090,-4040.59
  other v2: 2485,-3965
  other v3: 2517.28,-4360 2552.72,-4360
BCLK: C23.2 P8.3 U3.17 U8.7 | length 3597.2
  Top Layer w6: P8.3 2325,-1925 U3.17 ; C23.2 C23.2@2487.52,-4696.89
  Top Layer w8: C23.2 2485,-4530 2525.16,-4489.84 U8.7
  Bottom Layer w6: P8.3@2166.73,-2074.45 ccw(c2171,-2078.67) 2165,-2078.63 P8.3 2165,-2265 2385,-2485 2385,-4515 v2(2480,-4610)
BUTTON: P8.1 P14.1 U3.15 | length 2426.4
  Top Layer w6: P8.1 2225,-1825 U3.15
  Top Layer w8: P8.1 1965,-2275 1980,-2290 2693.67,-2290 cw(c2693.67,-2298) 2697.07,-2290.76 v2(2770,-2325) ; v2(3330,-2405) 3375,-2405 3412.83,-2367.17 P14.1
  Bottom Layer w8: v2(2770,-2325) 3201.67,-2404.86 ccw(c3203.14,-2397) 3203.14,-2405 v2(3330,-2405)
CHIP_PU: C4.1 P1.3 P11.6 R9.2 U3.3 | length 2401.1
  Top Layer w6: C4.1 R9.2 3299.41,-1330 v2(3395,-1330) P11.6
  Top Layer w8: P1.3 1969.77,-814.77 1969.77,-844.77 2050.79,-925.79 U3.3
  Bottom Layer w8: P1.3 2095,-805 2145,-855 2856.69,-855 ; 2856.73,-855 ccw(c2856.69,-847) 2862.33,-852.67 3007.67,-852.67 3020.47,-865.47 3275.47,-865.47 3315,-905 3315,-1250 v2(3395,-1330)
CHRGA: P8.11 U3.25 | length 659.4
  Top Layer w6: U3.25 2725,-1845 P8.11
CS: P1.5 P15.2 R11.2 U3.5 | length 2244.2
  Top Layer w6: R11.2@1837.51,-1051.01 1881.78,-1006.74 cw(c1886,-1011) 1886,-1005 P1.5 1972.91,-1005 1993.7,-1025.79 U3.5
  Top Layer w8: P15.2 1284.7,-1394.72 v2(1365,-1395)
  Bottom Layer w8: v2(1365,-1395) 1820.73,-1006.93 cw(c1825.94,-1013) 1825.94,-1005 P1.5
D+: P1.14 U3.14 | length 510.2
  Top Layer w6: P1.14 2155.51,-1709.49 U3.14
D-: P1.13 U3.13 | length 484.4
  Top Layer w6: P1.13 2102,-1663 2102,-1438 2114.21,-1425.79 U3.13
DGND: C1.2 C2.1 C3.2 C4.2 C8.2 C11.2 C13.1 C18.1 C20.2 C33.2 C34.2 C35.2 D1.K D2.K P1.1 P2.7 P3.2 P4.2 P9.14 P11.1 P12.2 P15.6 P16.2 R1.1 R6.1 R10.2 U1.1 U1.4 U1.5 U1.6 U1.10 U1.11 U1.15 U1.16 U1.20 U3.1 U3.40 U3.41_1 U3.41_2 U3.41_3 U3.41_4 U3.41_5 U3.41_6 U3.41_7 U3.41_8 U3.41_9 U3.41_10 U3.41_11 U3.41_12 U3.41_13 U3.41_14 U3.41_15 U3.41_16 U3.41_17 U3.41_18 U3.41_19 U3.41_20 U3.41_21 U6.2 U7.2 U9.2 | length 4543.4
  Top Layer w6: R6.1 1551.54,-698.46 1585,-665 v2(1585,-555) ; v2(1623.2,-851.61) 1623.2,-803.2 1615,-795 1615,-750.17 1625.78,-760.94 U7.2 ; v2(1860,-890) 1860,-878.09 1875,-863.09 C18.1 ; P1.1 2015,-605 2055,-645 C1.2 2056.38,-825.79 U3.1 ; U3.40 2894.21,-825.79 2900,-820 2900,-770 P9.14 ; R1.1 v2(3720,-4915)
  Top Layer w8: P15.6 v2(811.5,-1221.5) v2@820,-1230 ; C11.2 289.41,-815 289.41,-785 C13.1 ; D1.K 1170,-2095 1155,-2110 v2(1155,-2175) 1155,-2275 1170,-2290 D2.K ; U3.41_4@2385.83,-1179.84 2390.83,-1184.84 U3.41_5 ; U3.41_13 U3.41_2 2385.83,-1124.72 2390.83,-1129.72 U3.41_1 ; U3.41_11 U3.41_7 U3.41_8 ; U3.41_14 U3.41_5 ; U3.41_12 U3.41_9 U3.41_8 ; v2(3195,-1110) 3195,-1115 3174.41,-1135.59 3174.41,-1269.72 3179.1,-1274.41 C4.2 ; R10.2 3590,-2520 v2(3595,-2525) ; P11.1 v2(3650,-720) ; C35.2 4255,-4935.59 ; v2@4255,-5005 4255,-4935.59 ; C33.2 4255,-4935.59 ; C34.2 4259.69,-4559.41 4255,-4564.1 U9.2 4255,-4935.59 ; U3.41_5 U3.41_6 U3.41_3 U3.41_1 ; U3.41_1 U3.41_8
  Top Layer w10: v2(210,-785) 289.41,-785 U6.2 560,-785 570,-775 589.41,-775 C8.2 ; v2(1125,-940) C2.1 1125.91,-1014.41 C3.2
  other v1: 5245,-5430 4405,-5350 4885,-5350 5045,-5350 5125,-5350 5205,-5350 4525,-5270 4605,-5270 4685,-5270 4765,-5270 4925,-5270 5005,-5270 5085,-5270 5165,-5270 5245,-5270 4485,-5190 4565,-5190 4645,-5190 5125,-5190 5205,-5190 5285,-5190 4445,-5110 4525,-5110 4605,-5110 5165,-5110 5245,-5110 4485,-5030 4565,-5030 4725,-5030 4805,-5030 4885,-5030 4965,-5030 5045,-5030 5285,-5030 4765,-4950 4845,-4950 4925,-4950 5005,-4950 5085,-4950 4725,-4870 4805,-4870 4885,-4870 4965,-4870 5045,-4870 5285,-4870 4765,-4790 4845,-4790 4925,-4790 5005,-4790 5085,-4790 4405,-4710 4485,-4710 4725,-4710 4805,-4710 4885,-4710 4965,-4710 5045,-4710 5285,-4710 4445,-4630 4525,-4630 4605,-4630 5165,-4630 5245,-4630 4405,-4550 4485,-4550 4565,-4550 4645,-4550 4725,-4550 5045,-4550 5125,-4550 5205,-4550 5285,-4550 4445,-4470 4525,-4470 4605,-4470 4685,-4470 4765,-4470 5005,-4470 5085,-4470 5165,-4470 5245,-4470 4405,-4390 4485,-4390 4565,-4390 4645,-4390 4725,-4390 5045,-4390 5125,-4390 5205,-4390 5285,-4390 4445,-4310 4525,-4310 4605,-4310 4685,-4310 4765,-4310 4925,-4310 5005,-4310
  other v2: 4255,-5010
GPIO0: P9.1 P11.7 P11.8 U3.27 | length 1460.5
  Top Layer w6: U3.27 2910.79,-1475.79 2935,-1500 2935,-1835 3005,-1905 P9.1 3102.51,-1905 ccw(c3102.51,-1899) 3106.74,-1903.26 3193.27,-1816.73 ccw(c3189,-1812.51) 3195,-1812.51 3195,-1752.49 cw(c3201,-1752.49) 3196.74,-1748.26 3415,-1530 P11.8 3630,-1530 3650,-1510 P11.7
GPS_EN: P8.6 U3.20 U9.3 | length 4511.8
  Top Layer w6: P8.6 2465,-2175 2488.24,-2198.24 ccw(c2492.49,-2194) 2492.49,-2200 2837.51,-2200 cw(c2837.51,-2206) 2841.76,-2201.76 2903.39,-2263.39 cw(c2899.15,-2267.63) 2905.14,-2267.27 v2(2915,-2430)
  Top Layer w8: P8.6 U3.20@2465,-1535 ; v2(3485,-3660) 3525,-3620 3885,-3620 4217.6,-3952.6 U9.3
  Top Layer w10: U3.20@2465,-1535 U3.20
  Bottom Layer w6: v2(2915,-2430) 2944.35,-2664.77 ccw(c2950.3,-2664) 2950.3,-2670 3085,-2670 3285,-2870 3350,-2870 3485,-3005 v2(3485,-3660)
GPS_PIN: P9.9 U1.19 U3.35 | length 5454.8
  Top Layer w6: U3.35 3035.79,-1075.79 P9.9
  Top Layer w8: v2(3770,-3845) 3950,-4025 3950,-5010 4065,-5125 4315,-5125 4360,-5080 4360,-4995 4400.35,-4954.65 U1.19
  Bottom Layer w8: P9.9 3005,-1165 3005,-1335 3025,-1355 3115,-1355 3770,-2010 v2(3770,-3845)
GPS_RST: P9.6 U1.18 U3.32 | length 5156.9
  Top Layer w6: U3.32 2885.79,-1225.79 P9.6
  Top Layer w8: v2(3685,-3700) 4000.3,-3842.87 cw(c3997,-3850.16) 4005,-3850.16 4005,-4990 4105,-5090 4300,-5090 4325,-5065 4325,-4960 4405.16,-4879.84 U1.18
  Bottom Layer w8: P9.6 3685,-2025 v2(3685,-3700)
GPS_SCL: P6.4 U1.12 | length 655.3
  Top Layer w8: U1.12 4964.8,-4405.2 5050,-4320 P6.4
GPS_SDA: P6.2 U1.9 | length 573
  Top Layer w8: U1.9 5314.96,-4805.04 5370,-4750 P6.2
GREEN: P8.8 R20.2 U3.22 | length 1840.4
  Top Layer w6: U3.22 2575,-1995 P8.8
  Top Layer w8: R20.2 v2(1575,-2095)
  Bottom Layer w8: v2(1575,-2095) 1675,-1995 2575,-1995 P8.8
HYDRO_EN: P8.5 U2.3 U3.19 U4.3 U5.3 | length 4313
  Top Layer w8: U4.3 1865,-3474.84 v2(1865,-3400) ; v2(2215,-3860) 2587.76,-3860 2596.38,-3851.38 ; P8.5 2425,-2025 U3.19 ; U2.3@2574.22,-3794.76 ccw(c2575.3,-3786.83) 2575.1,-3794.83 2575.1,-3788.61 U2.3 2592.76,-3847.76 2596.38,-3851.38 ; U5.3 2972.24,-3817.76 2935,-3855 2600,-3855 2596.38,-3851.38
  Bottom Layer w8: v2(1865,-3400) 1995,-3400 2055,-3340 ; v2(2215,-3860) 2210,-3860 2055,-3705 2055,-3340 ; P8.5 2365,-2022.96 ccw(c2357,-2023) 2357,-2015 1920,-2015 1905,-2030 1905,-2425 2055,-2575 2055,-3340
I2SDIN: P1.12 U3.12 | length 454.9
  Top Layer w6: P1.12 2000,-1705 2090,-1615 2090,-1405 2119.21,-1375.79 U3.12
I2SDOUT: P8.4 R17.2 U3.18 | length 3372.1
  Top Layer w6: v2(2330,-4615) R17.2@2386.54,-4615
  Top Layer w8: P8.4 2375,-1975 U3.18 ; v2(2330,-2715) v2(2440,-2715)
  Bottom Layer w8: P8.4 2265,-2210 2432.66,-2377.66 cw(c2427,-2383.31) 2435,-2383.31 v2@2435,-2714.97 ; v2(2330,-4615) v2(2330,-2715)
IN_R: C19.1 P7.2 P10.2 | length 1937.9
  Top Layer w12: P7.2@1660,-4490 1715,-4490 ; C19.1@1764.41,-4490 1715,-4490 ; P10.2 2315,-5090 1715,-4490
IO38: P9.5 U3.31 | length 347.2
  Top Layer w6: U3.31 2890.79,-1275.79 3003.26,-1388.26 cw(c2999,-1392.49) 3005,-1392.49 3005,-1442.51 ccw(c3011,-1442.51) 3006.74,-1446.74 P9.5
IR_SLEEP: P2.5 P8.10 U3.24 | length 4622.1
  Top Layer w6: U3.24 2675,-1895 P8.10 2865,-2125 2920,-2180 3110,-2180 3185,-2105 3185,-1864.9 cw(c3191,-1864.94) 3186.73,-1860.72 3440.71,-1606.74 cw(c3444.94,-1611) 3444.94,-1605 3885,-1605 4040,-1450 v2(4090,-1450) ; P2.5 5597.5,-607.5 5597.5,-1267.5 v4(5600,-1270)
  Bottom Layer w6: v2(4090,-1450) 5420,-1450 v4(5600,-1270)
LRCLK: C28.2 P8.12 U3.26 U8.8 | length 3896.5
  Top Layer w6: C28.2@2576.26,-4690.67 C28.2@2580,-4694.41 ; U3.26 2775,-1790 3065,-2080 P8.12
  Top Layer w8: U8.8 2544.84,-4459.84 2585,-4500 v2(2585,-4605) 2585,-4689.41 C28.2@2580,-4694.41
  Bottom Layer w8: v2(2585,-4605) 2667.66,-4522.34 ccw(c2662,-4516.69) 2669.97,-4517.4 2674.86,-4463.14 ccw(c2640,-4460) 2675,-4459.66 2670,-3848.25 ccw(c2662,-3848.31) 2668.83,-3844.15 ; 2668.82,-3844.14 cw(c2675.66,-3839.98) 2667.66,-3840.02 2667.66,-2285.66 cw(c2675.66,-2285.66) 2670,-2280 2688.96,-2261.04 3018.96,-2261.04 3065,-2215 P8.12
MCLK: P1.9 U3.9 | length 293.2
  Top Layer w6: P1.9 2020,-1345 2020,-1305 2099.21,-1225.79 U3.9
MISO: P1.4 P15.7 R14.2 U3.4 | length 2160.9
  Top Layer w6: P1.4 2030.79,-975.79 U3.4
  Top Layer w8: P15.7 1531.81,-1178.19 1630,-1080 1630,-965 1660,-935 1930,-935 P1.4
MOSI: P1.7 P15.3 R13.2 U3.7 | length 2045.1
  Top Layer w6: R13.2@1770,-1260 1825,-1205 P1.7 2039.21,-1125.79 U3.7
  Top Layer w8: P15.3 1578.58,-1351.42 1671.54,-1258.46 R13.2
NetAv: P2.2
NetC7_1: C7.1 U2.4 | length 82.9
  Top Layer w8: U2.4 2704.9,-3797.4 2763.5,-3797.4 cw(c2763.5,-3805.4) 2769.15,-3799.74 C7.1
NetC12_1: C12.1 U4.4 | length 83.2
  Top Layer w8: C12.1 1688.19,-3477.6 U4.4
NetC13_2: C13.2 U6.4 | length 78.2
  Top Layer w8: C13.2 343.19,-747.6 U6.4
NetC16_1: C16.1 U5.4 | length 78.2
  Top Layer w6: C16.1 3052.6,-3986.81 U5.4
NetC17_1: C17.1 P5.2 | length 163.6
  Top Layer w6: C17.1@1799.41,-3865 C17.1@1809.41,-3855
  Top Layer w12: P5.2 C17.1@1799.41,-3865
NetC35_1: C35.1 U9.4 | length 83.2
  Top Layer w8: C35.1 4217.6,-4881.81 U9.4
NetD1_A: D1.A R20.1 | length 111.9
  Top Layer w8: D1.A R20.1
NetD2_A: D2.A R21.1 | length 104.4
  Top Layer w8: D2.A R21.1
NetP14_2: P14.2 R10.1 | length 111.1
  Top Layer w15: R10.1 P14.2
NetR2_2: R2.2 U1.7 | length 2290.5
  Top Layer w8: R2.2 3868.22,-5021.54 cw(c3868.22,-5029.54) 3873.85,-5023.85 3969.98,-5119.98 4260,-5410 5215,-5410 5365,-5260 5365,-4959.33 5360.31,-4954.65 U1.7
NetR3_2: R3.2 U1.14 | length 131.9
  Top Layer w6: R3.2 R3.2@4815.35,-4490.95
  Top Layer w8: U1.14 4815.2,-4495.39 R3.2@4820,-4490.59
NetR4_2: R4.2 U1.13 | length 129.6
  Top Layer w6: R4.2@4890,-4485.59 R4.2@4890.16,-4485.75
  Top Layer w8: U1.13 R4.2
PCM1: C17.2 U8.1 | length 811.5
  Top Layer w6: 1977.51,-3865 cw(c1977.51,-3871) 1981.74,-3866.74
  Top Layer w8: C17.2 1977.51,-3865 ; 1981.76,-3866.76 2315,-4200 2443.16,-4328.16 ccw(c2448.79,-4322.47) 2448.79,-4330.47 U8.1
PCM2: C24.2 U8.2 | length 287.2
  Top Layer w8: C24.2 2295,-4270 2332.34,-4307.34 2372.84,-4347.84 ccw(c2378.47,-4342.16) 2378.47,-4350.16 U8.2
PCM3: C19.2 U8.3 | length 703.7
  Top Layer w8: C19.2 1965,-4490 2082.81,-4372.19 cw(c2088.47,-4377.84) 2088.47,-4369.84 U8.3
PCM4: C27.2 U8.4 | length 336.8
  Top Layer w8: C27.2@2183.13,-4431.28 2183.13,-4391.87 cw(c2188.79,-4397.53) 2188.79,-4389.53 U8.4
PCM6: R17.1 U8.6 | length 194.1
  Top Layer w8: 2410,-4555 2435,-4555 2505.47,-4484.53 U8.6
PCM9: C14.1 C21.2 C22.2 C25.2 C26.2 C31.2 C32.2 U5.5 U8.9 U8.14 U8.17 | length 3265
  Top Layer w6: C32.2@2553.5,-4124.09 C32.2 ; C31.2 2553.5,-3961.5 2585,-3930 2875,-3930 2975,-4030 C25.2 ; C22.2 C22.2@2747.52,-4696.89 ; C25.2@2975,-4194.41 C25.2@2976.26,-4193.15 ; U5.5 3127.4,-3986.81 C14.1
  Top Layer w8: U8.17 2544.84,-4215.16 2555,-4205 C32.2@2555,-4125 ; U8.9 2564.53,-4434.53 2685,-4555 2685,-4605 C21.2 2694.09,-4699.41 C22.2 ; U8.14 2656.25,-4330.47 ccw(c2656.21,-4322.47) 2661.87,-4328.13 2790,-4200
  Top Layer w12: C32.2@2553.5,-4124.09 C31.2
  Top Layer w20: 2685,-4605 2875.28,-4605 3076.72,-4605 ccw(c3076.72,-4585) 3090.86,-4599.14 3162.67,-4527.33 3162.67,-4195 ; 2795,-4195 3162.67,-4195 ; C14.1 3214.41,-3989.41 3230,-4005 3230,-4127.67 3162.67,-4195
PCM11: R18.1 U8.11 | length 350.1
  Top Layer w6: R18.1@2889.02,-4502.52 R18.1@2891.54,-4500
  Top Layer w8: U8.11 2656.25,-4389.53 cw(c2656.21,-4397.53) 2661.84,-4391.84 2767.69,-4497.69 ccw(c2773.31,-4492) 2773.31,-4500 2790,-4500 R18.1@2891.54,-4500
PCM12: R15.1 U8.12 | length 308.9
  Top Layer w8: U8.12 2694.84,-4369.84 2725,-4400 2790,-4400 R15.1
PCM13: R19.1 U8.13 | length 316.5
  Top Layer w8: U8.13 2674.84,-4350.16 2697.66,-4327.34 cw(c2703.31,-4333) 2703.31,-4325 2855,-4325 R19.1@2896.54,-4325
PCM18: C40.2 U8.18 | length 228.6
  Top Layer w8: C40.2@2485,-4100 2485,-4175 2525.16,-4215.16 U8.18 ; C40.2 C40.2@2490,-4095.59
PCM19: R16.1 U8.19 | length 286.7
  Top Layer w6: R16.1 R16.1@2386.22,-4059.68
  Top Layer w8: R16.1@2386.22,-4070 2385,-4071.22 2385,-4126.69 ccw(c2393,-4126.69) 2387.34,-4132.34 2505.47,-4250.47 U8.19
PPS: P10.1 R1.2 R2.1 | length 415.6
  Top Layer w8: P10.1 3718.46,-5090 R1.2 R2.1
RED: P8.9 R21.2 U3.23 | length 2364.7
  Top Layer w6: U3.23 2625,-1945 P8.9
  Top Layer w8: R21.2 v2(1585,-2290)
  Bottom Layer w8: v2(1585,-2290) 1500,-2205 1500,-1995 1530,-1965 2645,-1965 P8.9
RESVD1: U3.28
RESVD2: U3.29
RESVD3: U3.30
RI: P2.3 P8.2 U3.16 | length 7326.6
  Top Layer w6: U3.16 2275,-1875 P8.2 2065,-2210 2097,-2242 2833.49,-2242 2855,-2263.51 2855,-2450 2895,-2490 3020,-2490 3226.76,-2283.24 3226.76,-1920.69 cw(c3232.76,-1920.73) 3228.48,-1916.52 3458.26,-1686.74 cw(c3462.49,-1691) 3462.49,-1685 v2(3840,-1685)
  Bottom Layer w6: v2(3840,-1685) 5840,-1685 6295,-1230 6295,-535 6200,-440 5855,-440 5795,-500 P2.3
RX_GPS: P9.7 R4.1 U3.33 | length 4842.7
  Top Layer w6: U3.33 2935.79,-1175.79 P9.7
  Top Layer w8: P9.7 3065,-1315 3075,-1315 3185,-1425 3535,-1425 3615,-1345 4139.8,-1345 4890,-2095.2 R4.1
RX_IRIDIUM: P2.1 P9.12 U3.38 | length 3692.7
  Top Layer w6: U3.38 2944.21,-925.79 P9.12
  Bottom Layer w6: P9.12 3380,-805 3705,-1130 5710,-1130 5875,-965 5875,-752.45 cw(c5881,-752.49) 5876.73,-748.27 5993.27,-631.73 ccw(c5989,-627.51) 5995,-627.51 P2.1
RXD0: P9.10 P11.4 U3.36 | length 730.9
  Top Layer w6: U3.36 3031.3,-1025.79 3052.09,-1005 P9.10 3205,-1005 3330,-1130 P11.4
SCK: P1.8 P15.5 R12.2 U3.8 | length 2589.4
  Top Layer w6: R12.2 1792.51,-1385 ccw(c1792.51,-1379) 1796.74,-1383.26 1873.26,-1306.74 cw(c1877.49,-1311) 1877.49,-1305 P1.8 2089.21,-1175.79 U3.8
  Top Layer w8: P15.5 v2@1189.8,-1264.8
  Bottom Layer w8: v2(1196.5,-1261.5) 1196.5,-1488.5 1237.99,-1530 1435,-1530 1660,-1305 P1.8
SCL: P1.11 P3.3 P6.3 R8.1 U3.11 | length 8640.4
  Top Layer w6: U3.11 2109.21,-1325.79 2075,-1360 2073.51,-1360 2070,-1363.51 2070,-1515 2050,-1535 2030,-1535 P1.11 R8.1 1828.46,-2210.98 ccw(c1834.46,-2210.98) 1830.2,-2215.2 2018.27,-2403.27 ccw(c2022.49,-2399) 2022.45,-2405 2710,-2405 2915,-2610 3730,-2610 3855,-2485 v2(4000,-2485)
  Bottom Layer w6: v2(4000,-2485) 5315,-2485 5470,-2640 P6.3
  Bottom Layer w8: P3.3 325,-2163.27 cw(c333,-2163.31) 327.31,-2157.69 877.67,-1607.33 cw(c883.31,-1613) 883.27,-1605 ; 883.31,-1605 P1.11
SD_EN: P1.6 U3.6 U6.3 | length 2374.4
  Top Layer w6: P1.6 1989.21,-1075.79 U3.6
  Top Layer w8: U6.3 529.9,-738.8 v2(600,-700)
  Bottom Layer w8: v2(600,-700) 1085.86,-753.98 cw(c1084.98,-761.93) 1090.7,-756.34 1297.08,-969.08 1290.05,-1431.91 ccw(c1298.05,-1432) 1298.05,-1440 1452.94,-1440 1787.94,-1105 P1.6
SDA: P1.10 P3.4 P6.1 R7.1 U3.10 | length 9850.5
  Top Layer w6: R7.1 P1.10 ; 2042.5,-2487.5 1641.74,-2086.74 cw(c1646,-2082.51) 1640,-2082.51 1640,-1547.49 cw(c1646,-1547.49) 1641.76,-1543.24 1740,-1445 1900,-1445 P1.10 ; U3.10 2099.21,-1275.79 2055,-1320 2055,-1410 P1.10 ; 2628.95,-2488.95 2833.27,-2693.27 ccw(c2837.49,-2689) 2837.45,-2695 3800,-2695 v2(3890,-2605)
  Top Layer w8: 2042.5,-2487.5 2624.29,-2487.5 cw(c2624.29,-2495.5) 2628.32,-2488.59 2628.95,-2488.95
  Bottom Layer w6: v2(3890,-2605) 3895,-2600 3895,-2378.51 3898.51,-2375 5365,-2375 5550,-2560 5550,-4416.49 5546.49,-4420 P6.1
  Bottom Layer w8: P3.4 965,-1655 1995,-1655 2020,-1630 2020,-1510 2015,-1505 P1.10
TX_GPS: P9.8 R3.1 U3.34 | length 4759.5
  Top Layer w6: U3.34 2930.79,-1125.79 3010,-1205 P9.8
  Top Layer w8: v2@4223.35,-1543.35 v2(4225,-1545) 4812.67,-2132.67 cw(c4807,-2138.31) 4815,-2138.27 ; R3.1 4815,-2138.31
  Bottom Layer w8: P9.8 3074.77,-1214.77 3104.77,-1214.77 3190,-1300 3190,-1410.2 3324.8,-1545 v2(4225,-1545)
TX_IRIDIUM: P2.4 P9.13 U3.39 | length 3269.2
  Top Layer w6: U3.39 2894.21,-875.79 P9.13
  Bottom Layer w6: P9.13 3360,-705 3730,-1075 5225,-1075 P2.4
TXD0: P9.11 P11.5 U3.37 | length 1019.2
  Top Layer w6: U3.37 2994.21,-975.79 P9.11 3195,-905 3320,-1030 3535,-1030 3650,-1145 P11.5
V_BCKP: R5.1 R6.2 U1.3 | length 9357.9
  Top Layer w6: R6.2 R5.1 1460,-560 1580,-440 4400,-440 5645,-1685 5645,-5170 5530,-5285 v2(5530,-5295)
  Top Layer w8: U1.3 4890,-5310 v2@4950,-5310
  Bottom Layer w6: v2(4950,-5315) 5507.51,-5315 ccw(c5507.51,-5309) 5511.76,-5313.24 v2(5530,-5295)
VA: C5.1 C29.2 C30.2 U2.5 U8.16 | length 421.3
  Top Layer w6: C30.2@2683.5,-4129.09 C30.2
  Top Layer w8: U8.16 2564.53,-4278.75 cw(c2572.53,-4278.79) 2566.84,-4273.16 2684.41,-4155.59 C30.2 ; U2.5 2727.03,-3722.6 ; v2@2750,-3680 2727.03,-3702.97 2727.03,-3722.6 ; C5.1@2766.81,-3722.6 2727.03,-3722.6
  Top Layer w12: C30.2@2683.5,-4129.09 C29.2
  other v2: 2615,-4220 2755,-3670
VCC_SD: C11.1 P15.4 U6.5 | length 1087.6
  Top Layer w8: P15.4 38.11,-1308.11 -10,-1260 -10,-1025 95,-920 360,-920 417.76,-862.24 U6.5 337.99,-822.4 C11.1
VGPS: C33.1 U1.2 U1.17 U9.5 | length 1489.1
  Top Layer w8: U9.5 U9.5@4295,-4804.84 ; C33.1 U9.5@4295,-4804.84 ; U1.17 4295.2,-4805.04 U9.5@4295,-4804.84 ; v2(4815,-5325) 4815.2,-5324.8 U1.2
  Bottom Layer w8: v2(4400,-4805) 4400,-5240 4485,-5325 v2(4815,-5325)
VH: C9.1 P5.1 P7.1 U4.5 | length 1340.6
  Top Layer w8: C9.1 1688.19,-3552.4 U4.5
  Top Layer w12: P7.1 1565,-4510 1565,-3940 ; P5.1 1590,-3965 1565,-3940 ; C9.1 1685.59,-3649.41 1660,-3675 1585,-3675 1565,-3695 1565,-3940
VIN: C2.2 C3.1 C6.1 C8.1 C10.1 C15.1 C20.1 C34.1 P2.6 P11.3 P13.3 U2.1 U4.1 U5.1 U6.1 U7.1 U7.4 U9.1 | length 20397.8
  Top Layer w6: 1575,-915 1769.84,-915 1809.92,-874.92 U7.4 ; U7.1@1678.11,-700 U7.1 ; U5.1 U5.1@3130,-3815.16
  Top Layer w8: U6.1 C8.1@596.81,-822.4 ; U4.1 1864.84,-3555 2000,-3555 ; C6.1 2503.19,-3722.6 U2.1 ; U9.1 4292.4,-4660.47 4292.4,-4613.19 C34.1
  Top Layer w12: P13.3@1495,-1075 1575,-995 1575,-915 1575,-724.97 cw(c1587,-724.97) 1578.51,-716.49 1595,-700 U7.1@1678.11,-700 ; U5.1@3130,-3815.16 C15.1@3130,-3725.59 ; P11.3 v2(3750,-1030)
  Top Layer w20: C8.1@596.81,-822.4 599.21,-820 825,-820 ; P13.3 875,-1065 875,-870 ; U2.1 2595,-3720.35 2595,-3575 ; C15.1 3135.59,-3595 ccw(c3115.59,-3595) 3115.59,-3575 ; 4292.4,-4660.47 4334.53,-4660.47 4350,-4645 4350,-4616.94 4350,-3998.28 ccw(c4330,-3998.28) 4344.14,-3984.14 3935,-3575 3115.59,-3575 ; P2.6 5495,-385 5195,-85 1490,-85 875,-700 875,-870 ; 825,-820 875,-870 ; 825,-820 650,-645 -250,-645 -345,-740 -345,-2335 -85,-2595 1186.72,-2595 cw(c1186.72,-2615) 1200.9,-2600.9 1930,-3330 cw(c1915.92,-3344.2) 1930.06,-3330.06 1980,-3380 1980,-3535 ccw(c2000,-3535) 2000,-3555 2575,-3555 cw(c2575,-3575) 2595,-3575 ; 2595,-3575 3115.59,-3575
  Bottom Layer w15: P13.3 1570.61,-994.39 ccw(c1560,-983.79) 1575,-983.79 1575,-671.21 cw(c1590,-671.21) 1579.39,-660.61 1680,-560 1993.15,-560 2066.61,-633.47 2066.61,-707.16 2136.15,-776.7 ccw(c2145.67,-767.13) 2145.67,-780.63 2854.33,-780.63 ccw(c2854.33,-767.13) 2866.27,-773.42 2931.73,-649.22 cw(c2945,-656.21) 2934.38,-645.62 3025,-555 3275,-555 v2(3750,-1030)
VSENS: P8.7 U3.21 | length 576.6
  Top Layer w6: U3.21 2525,-2045 P8.7
pads on no net: P9.2 P9.3 P9.4 P11.2 P13.1 P14.3 P14.4 P15.0 P15.1 P15.8 U1.8 U7.3
copper on no net: | length 100
  Top Layer w10: 3295,-4390 3395,-4390

## Polygon pours and split planes (outlines as drawn)
DGND on Bottom Layer "DGND_L04_P001" (solid, pour order 1): 4375,-4280 5320,-4280 5320,-5500 4385,-5500
DGND on Top Layer "DGND_L01_P000" (solid, pour order 0): 4375,-4280 5320,-4280 5320,-5495 5325,-5500 4385,-5500
AGND on Layer 1 (split plane): 3339.9,-2942.11 3339.9,-6557.54 89.15,-6557.54 80.14,-6556.35 72.97,-6553.38 65.76,-6547.85 -430.44,-6051.65 -435.3,-6045.55 -438.2,-6039.55 -439.68,-6033.04 -439.68,-6026.38 -438.2,-6019.88 -435.3,-6013.87 -430.44,-6007.77 -286.09,-5863.42 -285.46,-5862.65 -284.76,-5861.95 -271.02,-5845.21 -268.83,-5841.93 -258.62,-5822.83 -258.18,-5821.76 -257.11,-5819.19 -250.82,-5798.46 -250.21,-5795.37 -250.05,-5794.6 -247.93,-5773.04 -247.93,-5769.1 -250.05,-5747.54 -250.21,-5746.77 -250.82,-5743.68 -257.11,-5722.95 -257.99,-5720.82 -258.62,-5719.31 -267.99,-5701.77 -268.74,-5699.47 -269.45,-5697.86 -270.13,-5696.22 -270.24,-5696.05 -270.32,-5695.87 -271.33,-5694.42 -272.32,-5692.95 -286.06,-5676.2 -287.45,-5674.81 -288.84,-5673.42 -305.59,-5659.68 -308.86,-5657.49 -327.97,-5647.28 -329.03,-5646.83 -331.61,-5645.77 -352.34,-5639.48 -355.43,-5638.86 -356.2,-5638.71 -377.76,-5636.59 -381.7,-5636.59 -403.25,-5638.71 -404.02,-5638.86 -407.12,-5639.48 -427.85,-5645.77 -430.42,-5646.83 -431.49,-5647.28 -450.59,-5657.49 -453.87,-5659.68 -470.61,-5673.42 -470.76,-5673.56 -470.93,-5673.68 -472.15,-5674.95 -473.4,-5676.2 -473.51,-5676.37 -473.65,-5676.52 -474.61,-5678.01 -475.59,-5679.48 -475.67,-5679.67 -475.78,-5679.84 -476.42,-5681.49 -477.09,-5683.12 -477.13,-5683.32 -477.21,-5683.51 -477.52,-5685.25 -477.57,-5685.52 -615.13,-5823.08 -621.23,-5827.94 -627.24,-5830.83 -633.74,-5832.32 -640.41,-5832.32 -646.91,-5830.83 -652.91,-5827.94 -659.02,-5823.08 -1155.21,-5326.88 -1160.75,-5319.67 -1163.72,-5312.5 -1164.9,-5303.48 -1164.9,-2785.1 3182.89,-2785.1
DGND on Layer 1 (split plane): 256 vertices, not listed, extent -1164.9,-6557.54 6544.9,1152.27
VA on Layer 2 (split plane): 3339.9,-2942.11 3339.9,-6557.54 89.15,-6557.54 80.14,-6556.35 72.97,-6553.38 65.76,-6547.85 -430.44,-6051.65 -435.3,-6045.55 -438.2,-6039.55 -439.68,-6033.04 -439.68,-6026.38 -438.2,-6019.88 -435.3,-6013.87 -430.44,-6007.77 -286.09,-5863.42 -285.46,-5862.65 -284.76,-5861.95 -271.02,-5845.21 -268.83,-5841.93 -258.62,-5822.83 -258.18,-5821.76 -257.11,-5819.19 -250.82,-5798.46 -250.21,-5795.37 -250.05,-5794.6 -247.93,-5773.04 -247.93,-5769.1 -250.05,-5747.54 -250.21,-5746.77 -250.82,-5743.68 -257.11,-5722.95 -257.99,-5720.82 -258.62,-5719.31 -267.99,-5701.77 -268.74,-5699.47 -269.45,-5697.86 -270.13,-5696.22 -270.24,-5696.05 -270.32,-5695.87 -271.33,-5694.42 -272.32,-5692.95 -286.06,-5676.2 -287.45,-5674.81 -288.84,-5673.42 -305.59,-5659.68 -308.86,-5657.49 -327.97,-5647.28 -329.03,-5646.83 -331.61,-5645.77 -352.34,-5639.48 -355.43,-5638.86 -356.2,-5638.71 -377.76,-5636.59 -381.7,-5636.59 -403.25,-5638.71 -404.02,-5638.86 -407.12,-5639.48 -427.85,-5645.77 -430.42,-5646.83 -431.49,-5647.28 -450.59,-5657.49 -453.87,-5659.68 -470.61,-5673.42 -470.76,-5673.56 -470.93,-5673.68 -472.15,-5674.95 -473.4,-5676.2 -473.51,-5676.37 -473.65,-5676.52 -474.61,-5678.01 -475.59,-5679.48 -475.67,-5679.67 -475.78,-5679.84 -476.42,-5681.49 -477.09,-5683.12 -477.13,-5683.32 -477.21,-5683.51 -477.52,-5685.25 -477.57,-5685.52 -615.13,-5823.08 -621.23,-5827.94 -627.24,-5830.83 -633.74,-5832.32 -640.41,-5832.32 -646.91,-5830.83 -652.91,-5827.94 -659.02,-5823.08 -1155.21,-5326.88 -1160.75,-5319.67 -1163.72,-5312.5 -1164.9,-5303.48 -1164.9,-2785.1 3182.89,-2785.1
3V3 on Layer 2 (split plane): 256 vertices, not listed, extent -1164.9,-6557.54 6544.9,1152.27

## Other copper
Layer 1 (plane layer: these items are gaps in the copper):
  lines w10: -1195,-2780 3185,-2780 3345,-2940 3345,-6580
Layer 2 (plane layer: these items are gaps in the copper):
  lines w10: -1185,-2780 3185,-2780 3345,-2940 3345,-6580

## Silkscreen, mask and mechanical layers (free items; w line width, h text height)
Top Overlay:
  text "G" at 2354.33,-225 h60 r90
  text "G" at 2764.33,-225 h60 r90
  text "+" at 2365.36,-310 h100 r90
  text "+" at 2775.36,-310 h100 r90
  text "G" at 5370,-504.33 h60
  text "Vbat" at 5440.06,-504.39 h60
  text "Slp" at 5570,-504.34 h60
  text "Tx" at 5670,-505 h60
  text "RI" at 5770,-505 h60
  text "RX" at 5960,-505 h60
  text "OFF" at 1320,-665 h60 r270
  text "ON" at 1340,-1115 h60 r270
  text "G" at 210,-2069.33 h60
  text "C" at 310,-2074.33 h60
  text "V" at 110.06,-2075 h60
  text "D" at 405,-2075 h60
  text "Iridium" at 3629.39,-2965 h60 r90
  text "G" at 1395.67,-3745 h60 r270
  text "L" at 1395,-3855 h60 r270
  text "VH" at 1400,-3945.06 h60 r270
  text "G" at 1370.67,-4370 h60 r270
  text "R" at 1375,-4480 h60 r270
  text "VH" at 1375,-4565.06 h60 r270
  text "PPS" at 3310,-5224.33 h60
  text "Loggerhead Medusa-AI" at 2370,-6022.42 h200
Mechanical 1:
  drawing of 168 lines, arcs and shapes, not listed

## Text inside footprints (layer, text, board x,y; h text height)
C2: Top Overlay "+" at 1140,-1090 h19.68 r270
C21: Top Overlay "+" at 2670,-4685 h19.68 r90
C25: Top Overlay "+" at 2960,-4170 h19.68 r90
C29: Top Overlay "+" at 2660,-4080 h19.68 r180
C31: Top Overlay "+" at 2530,-4070 h19.68 r180
P6: Top Overlay "1" at 5490,-4500 h50 r90; Top Overlay "2" at 5390,-4520 h50 r90; Top Overlay "4" at 5390,-4260 h50 r90; Top Overlay "3" at 5490,-4260 h50 r90
U3: Mechanical 13 "ANTENNA" at 2322.83,-658.86 h50